# Altium PCB C2Sv0_PROCESSOR.PcbDoc (part 1 of 3)
Units mm, origin at the board's own origin, x right, y up, seen from the top; angles counter-clockwise.
Board outline 116 x 70 mm, 4 copper layers (Top Layer, Mid Layer 1, Mid Layer 2, Bottom Layer), stack 1.57 mm thick; 172 components, 108 nets, 793 pads, 402 vias.
Unrouted connection lines stored in the file: 3.
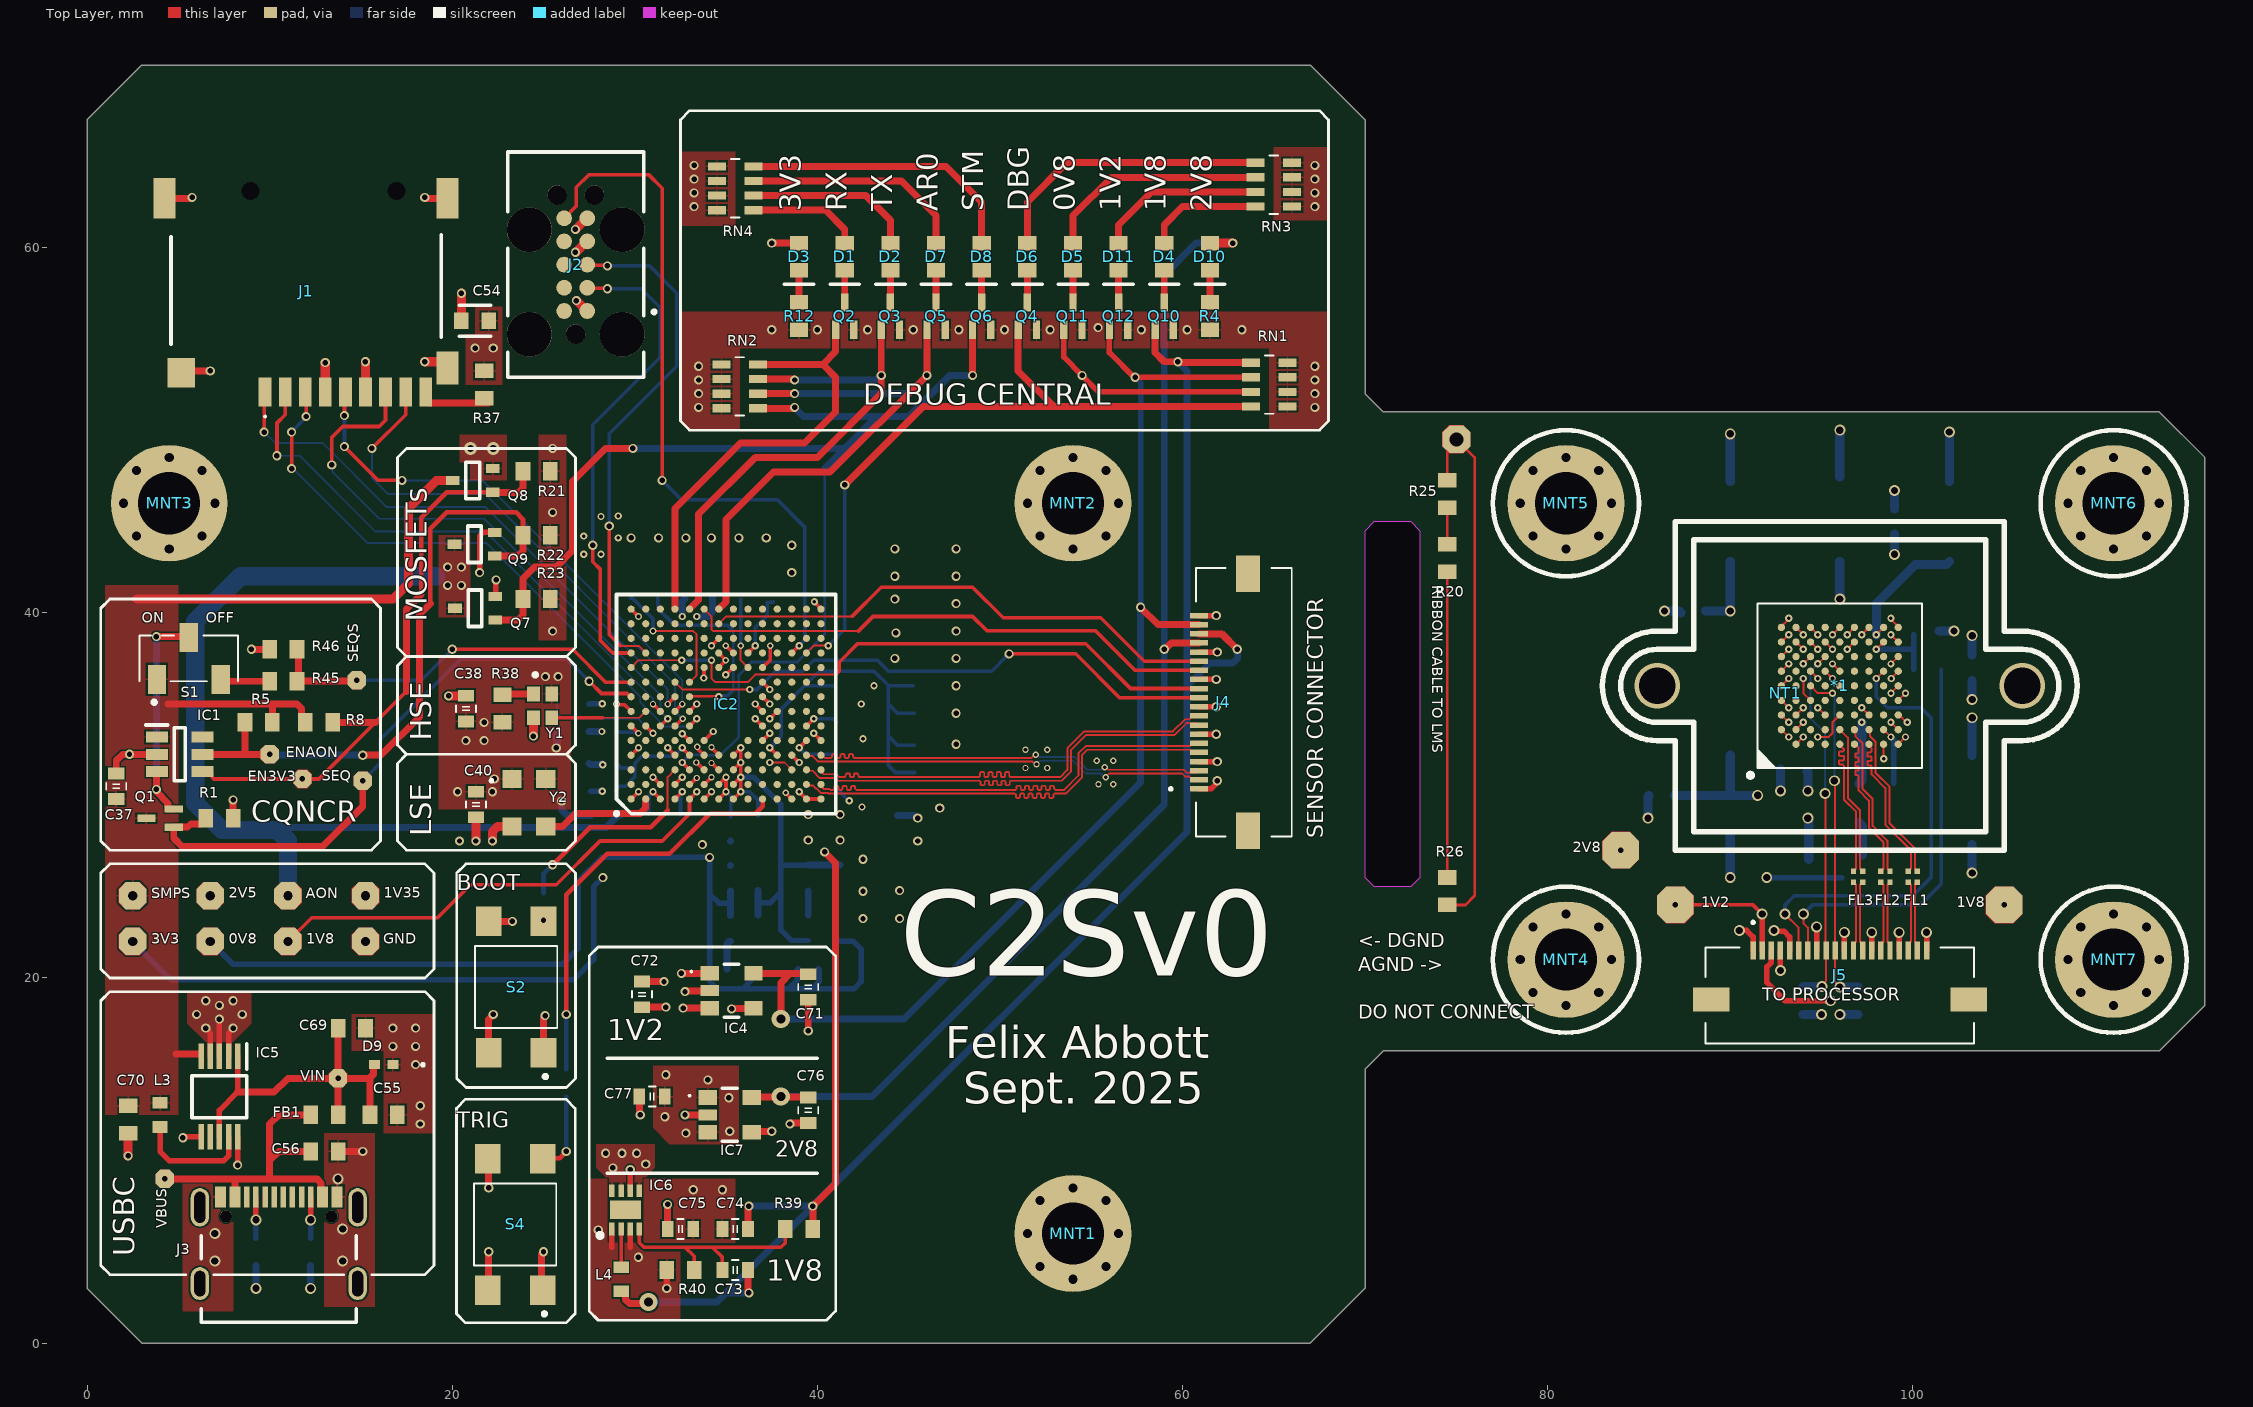
[diagram p0: Top Layer view]
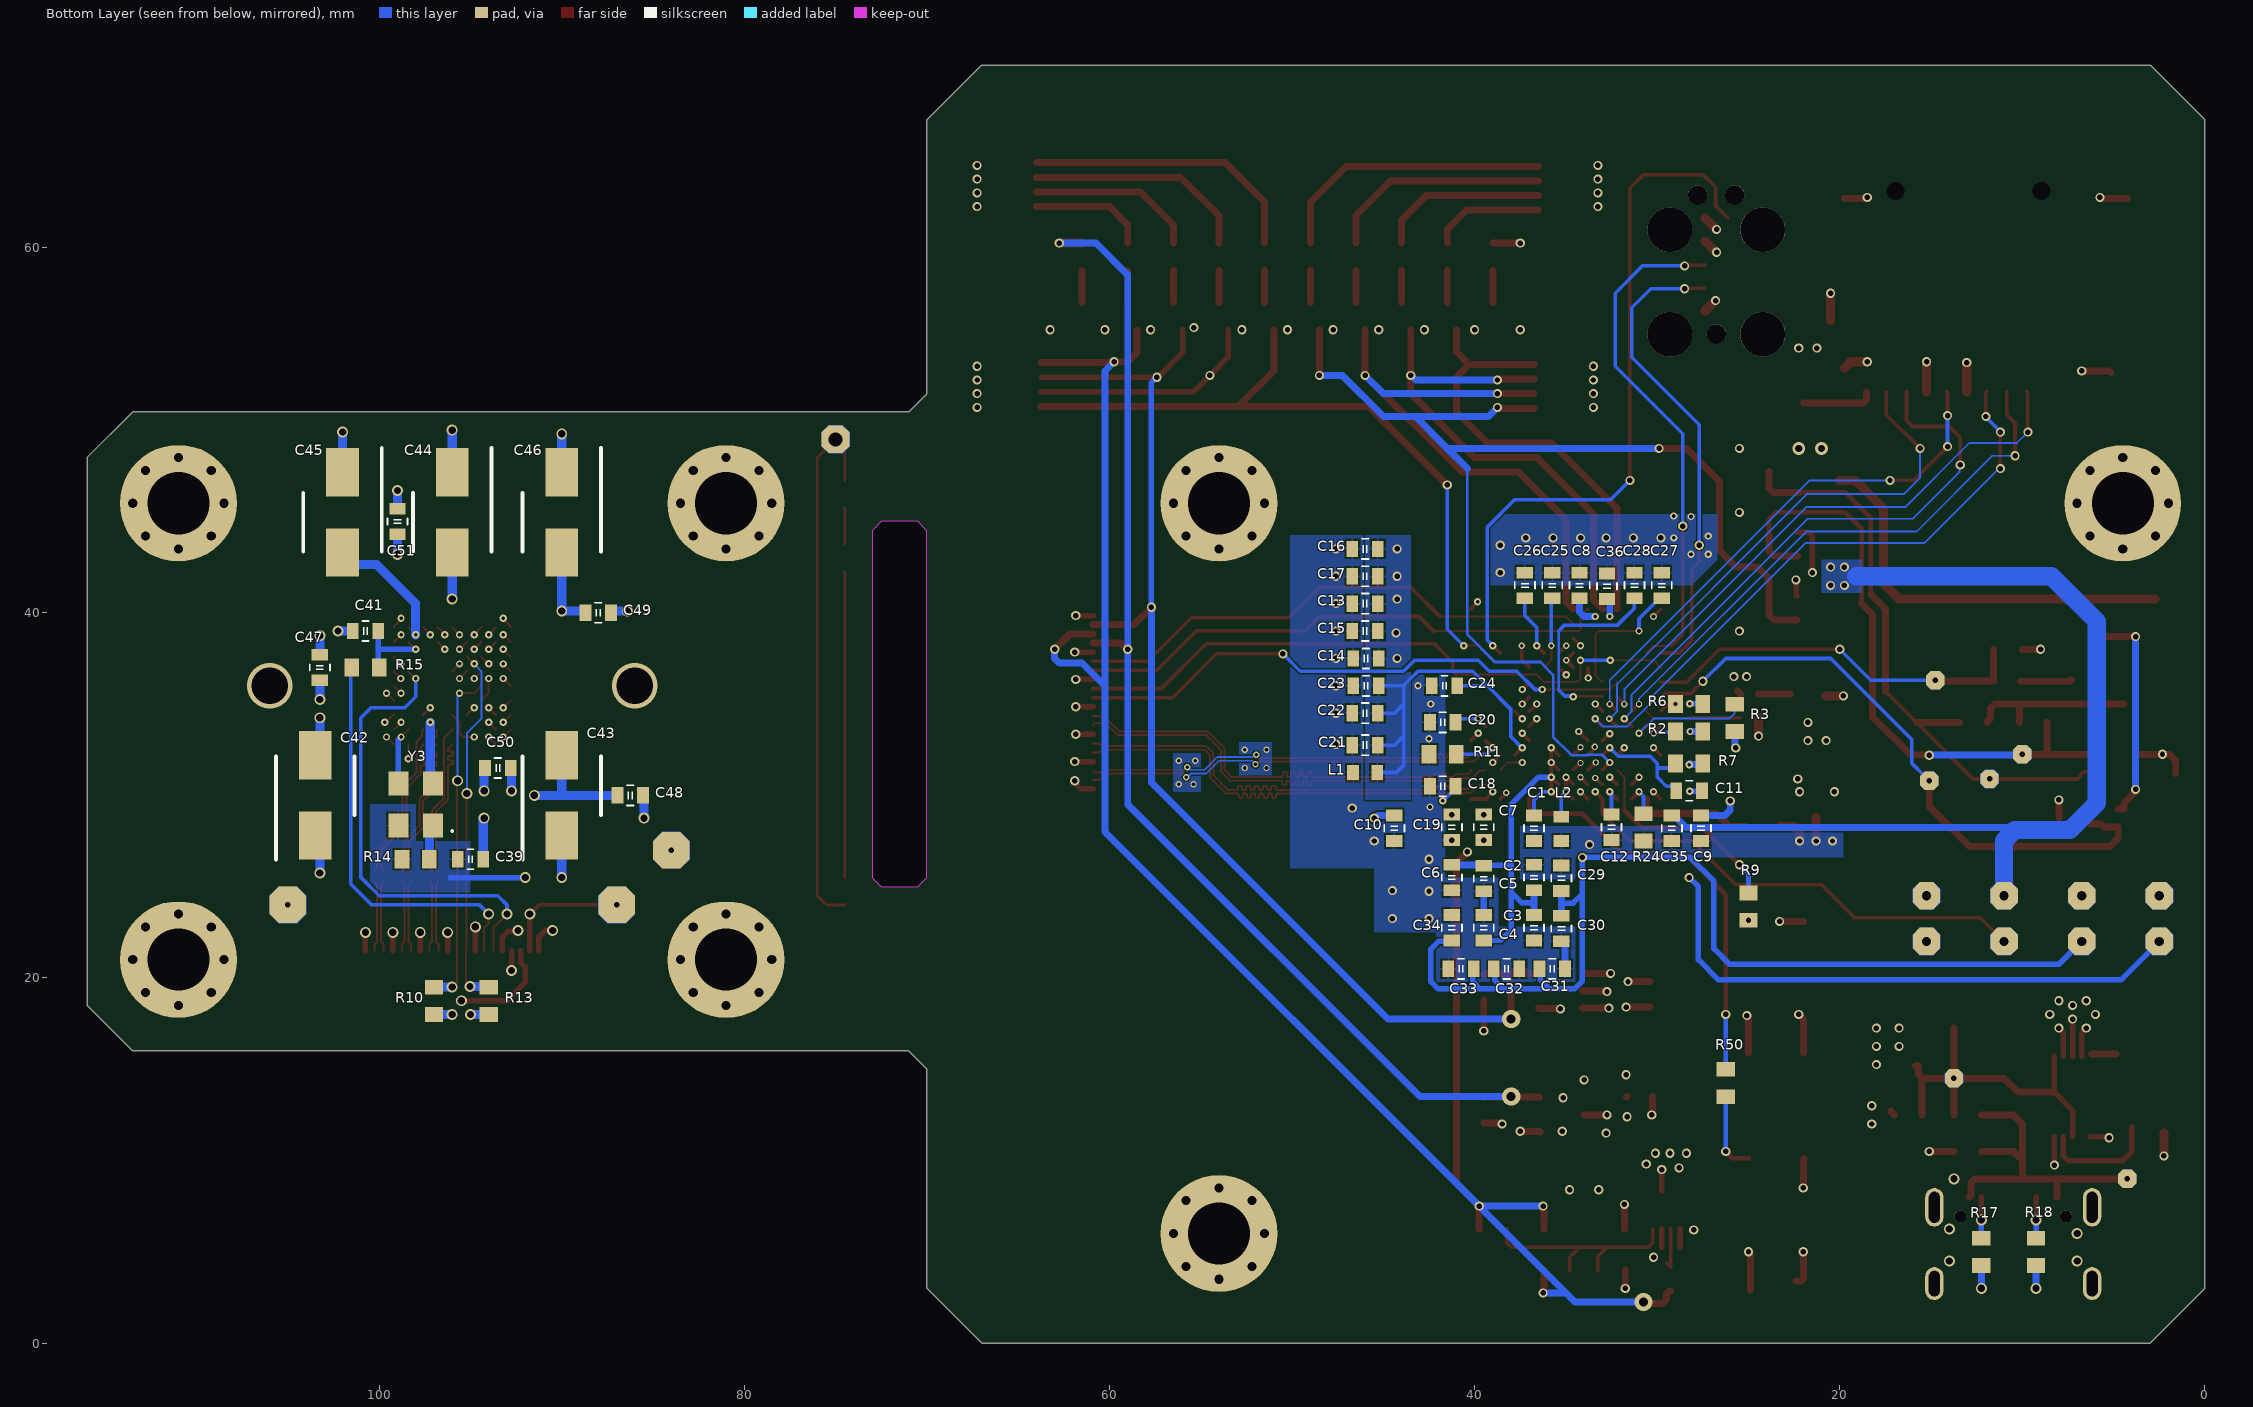
[diagram p1: Bottom Layer view, seen from below]
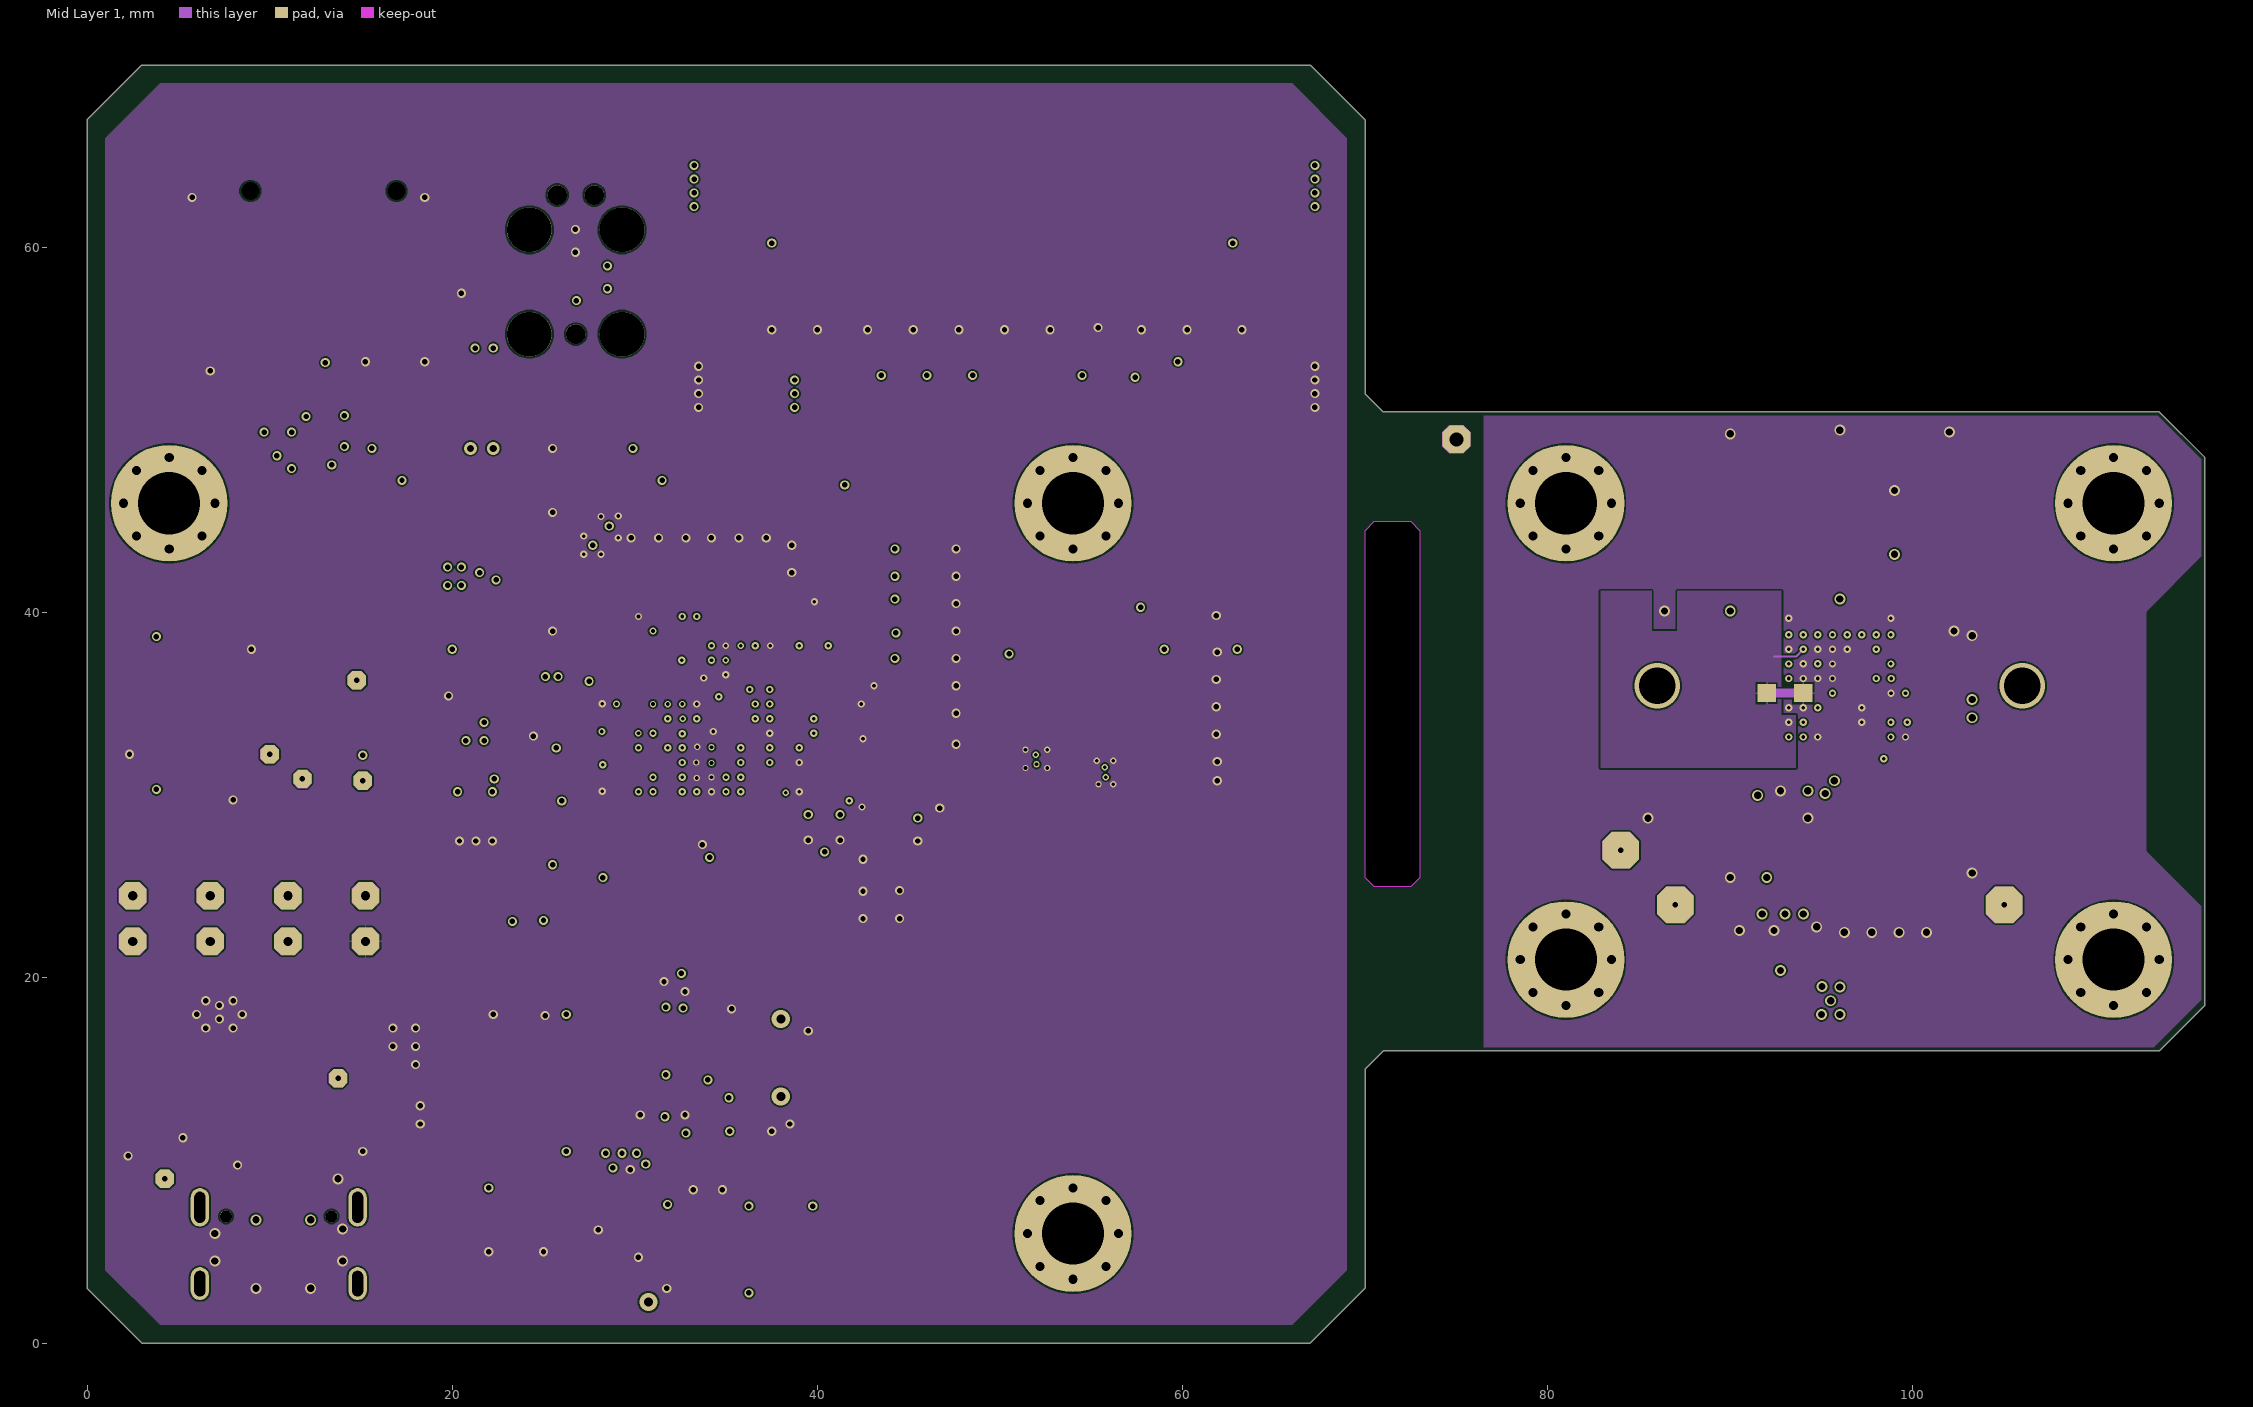
[diagram p2: Mid Layer 1]
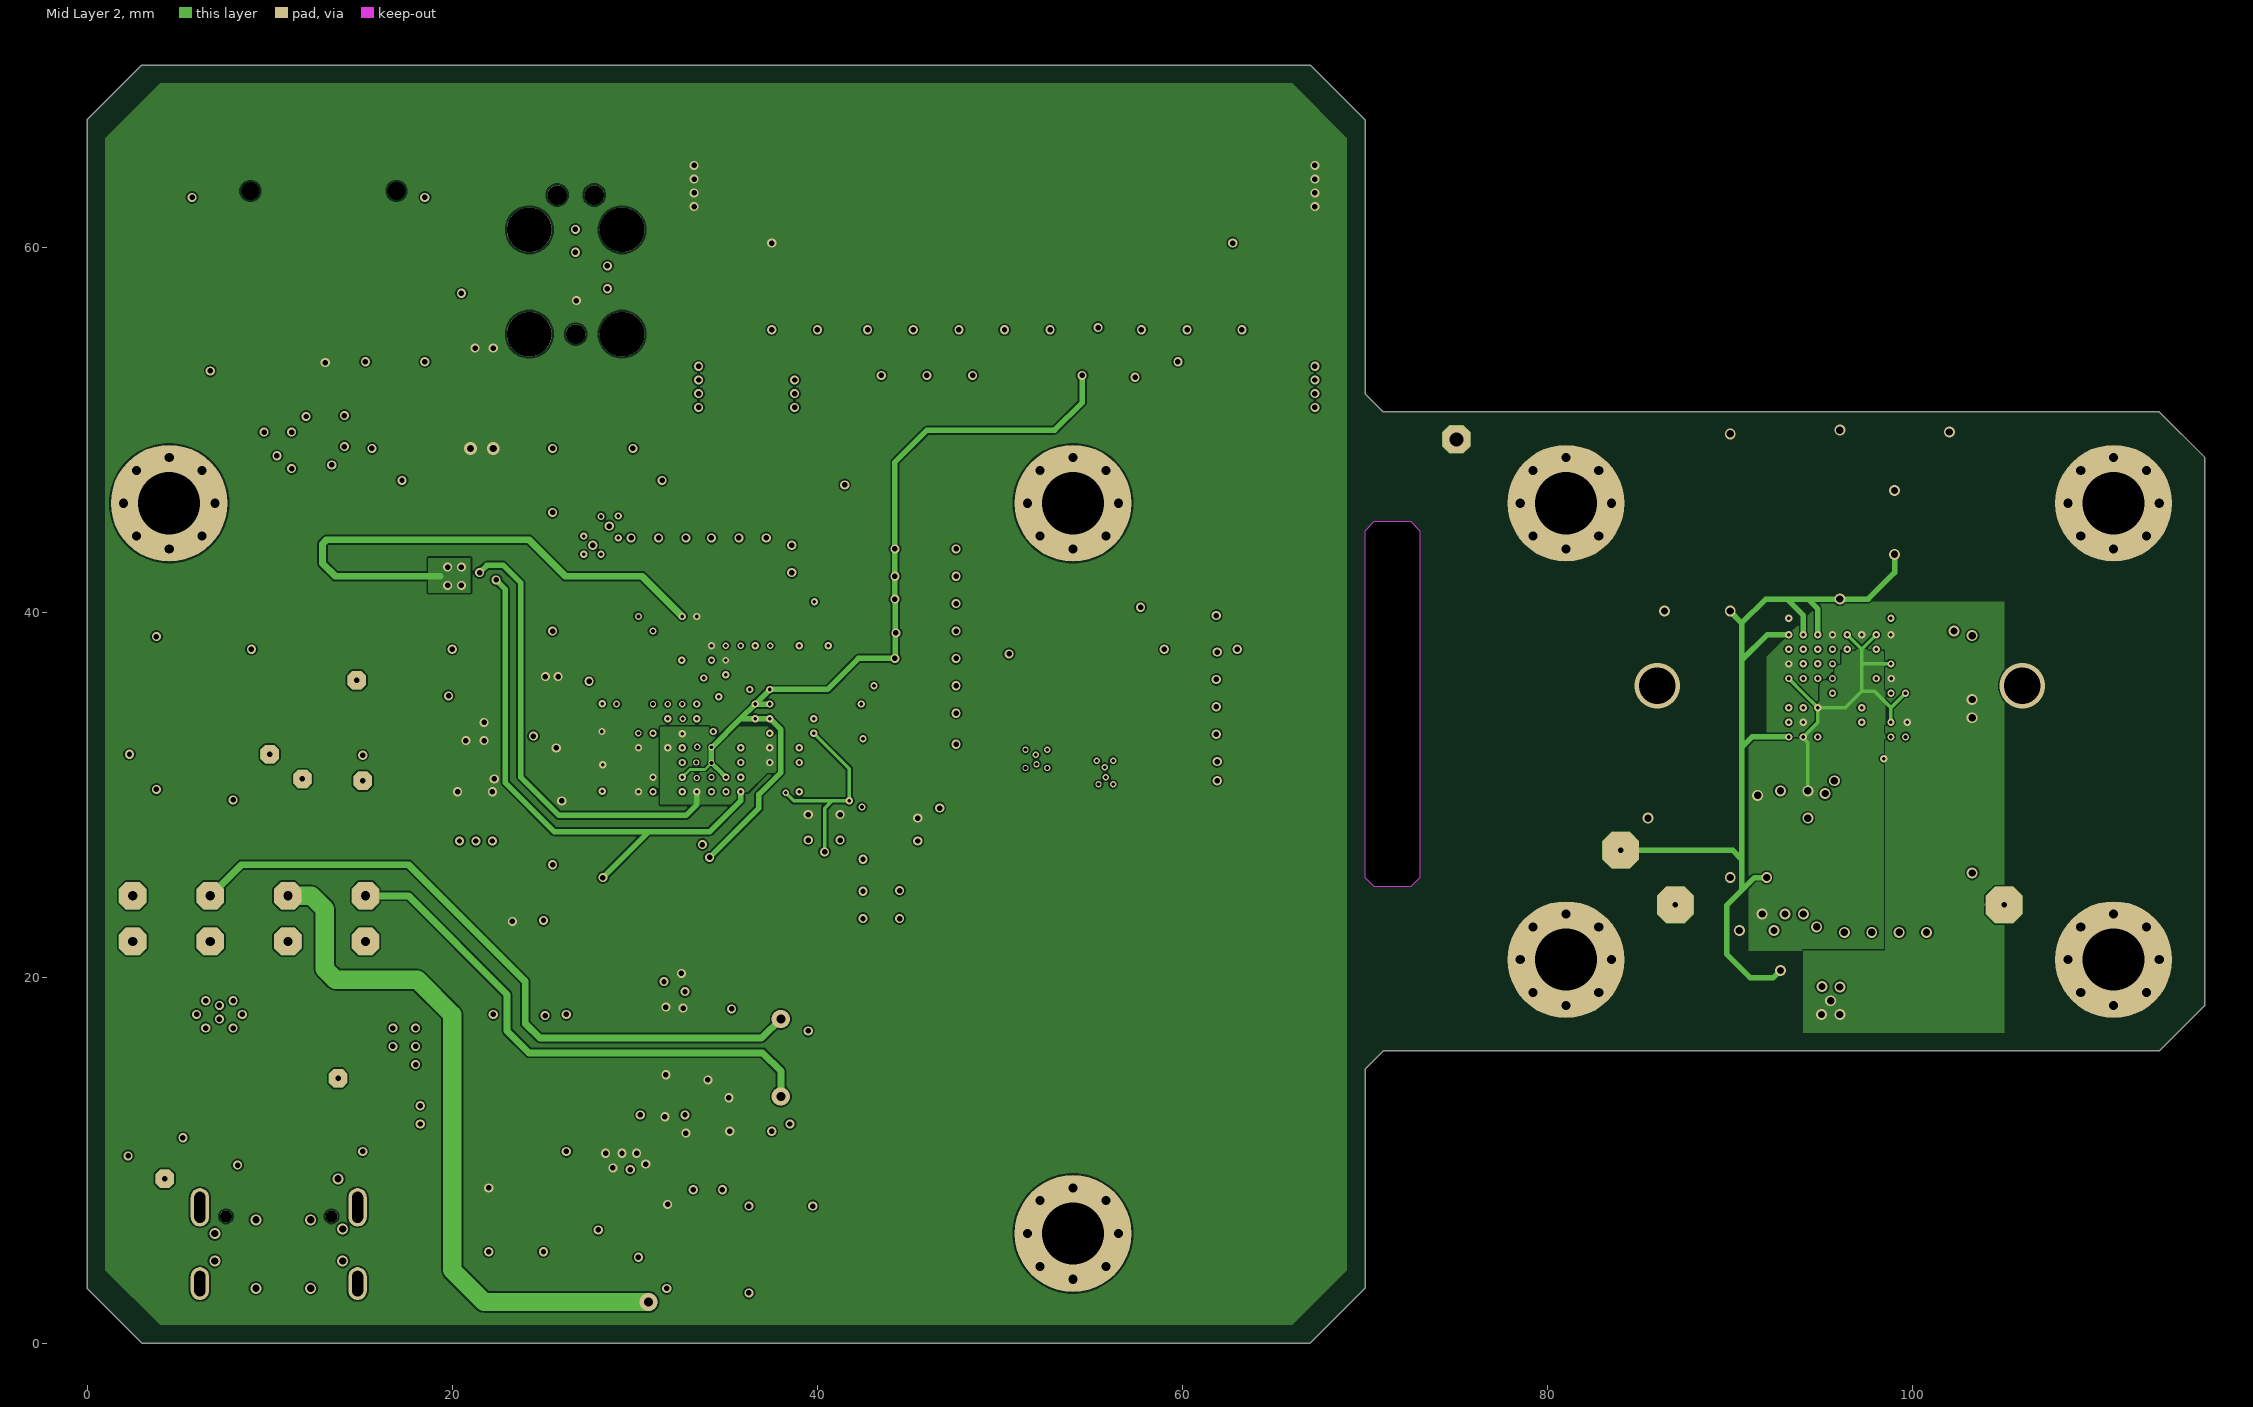
[diagram p3: Mid Layer 2]
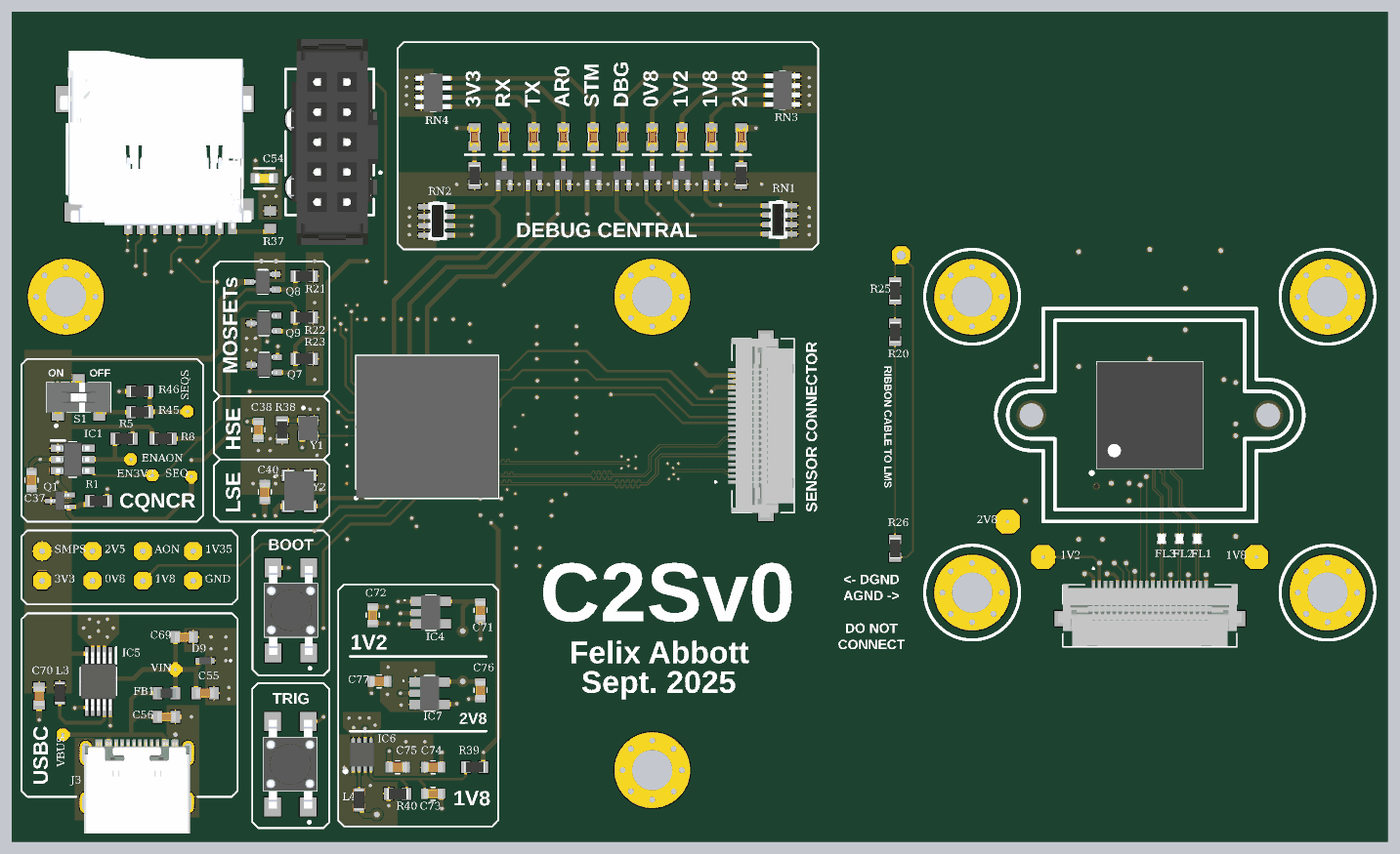
[diagram p5: 3D render of the assembled board from above, using the file's embedded part models]
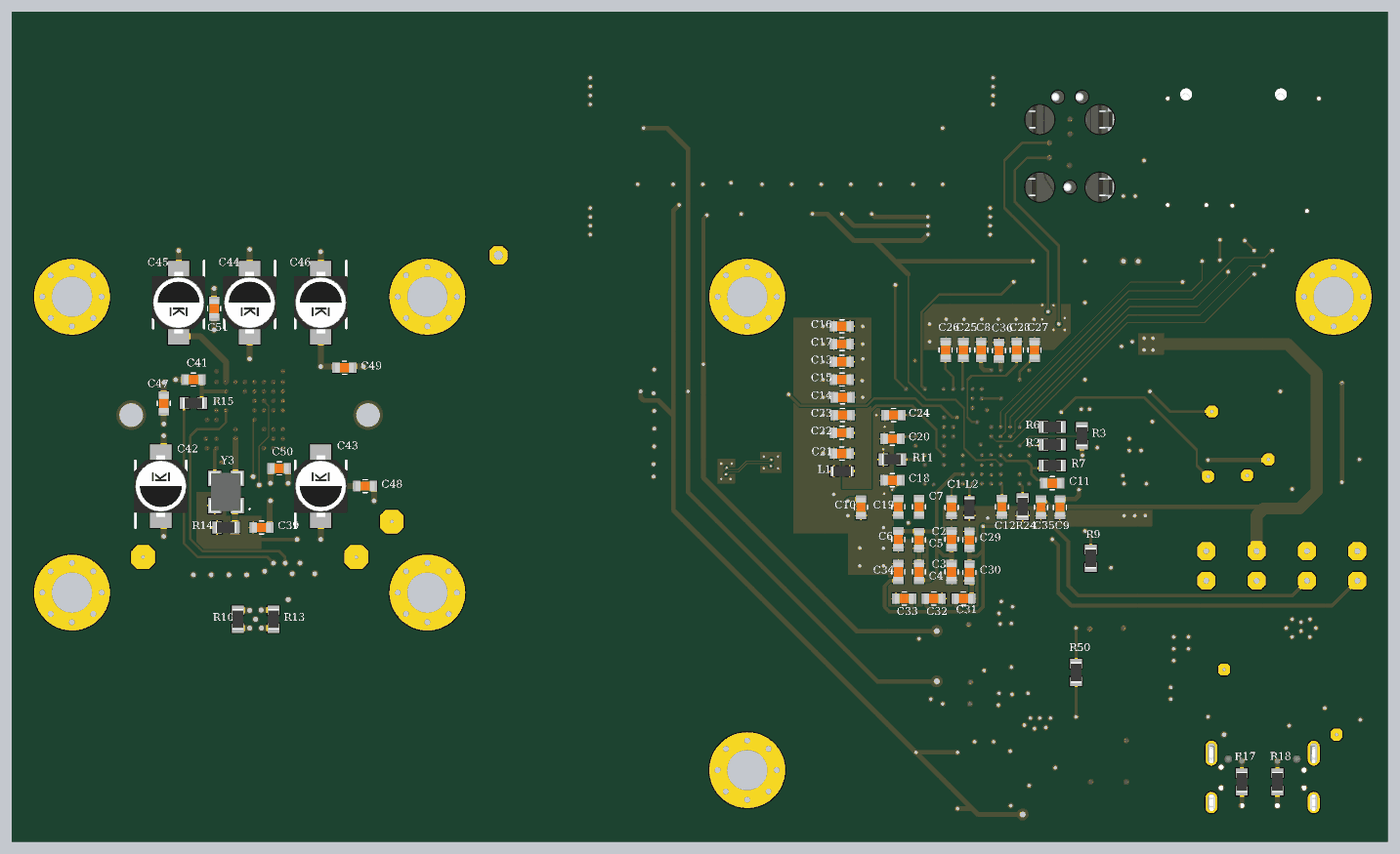
[diagram p6: 3D render of the assembled board from below, using the file's embedded part models]

## Layer stack, top to bottom
Top Solder: solder mask 0.0127, Solder Resist, Dk 3.8
Top Layer: signal copper 0.035
Dielectric 1: prepreg 0.1, 2313, Dk 4.05
Mid Layer 1: signal copper 0.0175
Core: core 1.265, FR-4, Dk 4.5
Mid Layer 2: signal copper 0.0175
Dielectric 2: prepreg 0.1, 2313, Dk 4.05
Bottom Layer: signal copper 0.035
Bottom Solder: solder mask 0.0127, Solder Resist, Dk 3.8

## Board outline
3,0 67,0 70,3 70,15 71,16 113.5,16 116,18.5 116,48.5 113.5,51 71,51 70,52 70,67 67,70 3,70 0,67 0,3
cut-out: 73,25.5 72.5,25 70.5,25 70,25.5 70,44.5 70.5,45 72.5,45 73,44.5

## Design rules (kind name [scope] priority, off if disabled: settings)
BoardOutlineClearance [All] p1: gap=0.2 ignorepadtopadclearanceinfootprint=FALSE
Clearance [All] p1: gap=0.089 ignorepadtopadclearanceinfootprint=TRUE except(0.1: Arc-Hole Track-Hole SMDPad-Hole THPad-Hole Via-Hole Fill-Hole Poly-Hole Region-Hole Text-Hole)
ComponentClearance [All] p1: gap=0.102 collisioncheckmode=3 verticalgap=0.102 showdistances=TRUE
DiffPairsRouting [All] p1: maxlimit=0.102 minlimit=0.102 mostfreqgap=0.102 toplayer_minwidth=0.102 toplayer_maxwidth=1816.048 toplayer_prefwidth=0.102 midlayer1_minwidth=0.102 midlayer1_maxwidth=1816.048 midlayer1_prefwidth=0.102 midlayer2_minwidth=0.102 midlayer2_maxwidth=1816.048 midlayer2_prefwidth=0.102 bottomlayer_minwidth=0.102 bottomlayer_maxwidth=1816.048 bottomlayer_prefwidth=0.102 maxuncoupledlength=12.7
Height [All] p1: minheight=0 maxheight=1816.048 prefheight=12.7
HoleSize [All] p1: absolutevalues=TRUE maxlimit=6.3 minlimit=0.2 maxpercent=80.000 minpercent=20.000
HoleToHoleClearance [All] p1: gap=0.25 allowstackedmicrovias=FALSE
MatchedLengths MatchedLengths_2 [InDifferentialPairClass('Post AR Diffs')] p1: tolerance=25.4 checknetsindiffpair=FALSE checkdiffpairvsdiffpair=TRUE checkxsignals=TRUE checkothers=TRUE usedelayunits=TRUE delaytolerance=20.000000
MatchedLengths MatchedLengths_1 [InDifferentialPairClass('STM Diffs')] p2: tolerance=25.4 checknetsindiffpair=FALSE checkdiffpairvsdiffpair=TRUE checkxsignals=TRUE checkothers=TRUE usedelayunits=TRUE delaytolerance=20.000000
MatchedLengths [InDifferentialPairClass('AR Diffs')] p3: tolerance=25.4 checknetsindiffpair=FALSE checkdiffpairvsdiffpair=TRUE checkxsignals=TRUE checkothers=TRUE usedelayunits=TRUE delaytolerance=20.000000
MinimumAnnularRing [All] p1: minimumring=0.05
MinimumSolderMaskSliver MinimumSolderMaskSliver_1 [All] p1: minsoldermaskwidth=0.102
MinimumSolderMaskSliver [All] p2: minsoldermaskwidth=0.102
PlaneClearance [All] p1: clearance=0.102
PlaneConnect PlaneConnectPowerPads [InPadClass('PowerPads')] p1: planeconnectstyle=Direct reliefexpansion=0.508 reliefentries=4 reliefconductorwidth=0.254 reliefairgap=0.254
PlaneConnect [All] p2: pad.planeconnectstyle=Relief pad.reliefexpansion=0.3 pad.reliefentries=4 pad.reliefconductorwidth=0.102 pad.reliefairgap=0.102 via.planeconnectstyle=Direct via.reliefexpansion=0.3 via.reliefentries=4 via.reliefconductorwidth=0.127 via.reliefairgap=0.127
PolygonConnect PolygonConnectPowerPads [All vs (InPadClass('PowerPads'))] p1: connectstyle=Direct reliefconductorwidth=0.254 reliefentries=4 polygonreliefangle="90 Angle" airgapwidth=0.254
PolygonConnect [All] p2: thpad.connectstyle=Relief thpad.reliefconductorwidth=0.102 thpad.reliefentries=4 thpad.polygonreliefangle="90 Angle" thpad.airgapwidth=0.102 smdpad.connectstyle=Relief smdpad.reliefconductorwidth=0.102 smdpad.reliefentries=4 smdpad.polygonreliefangle="90 Angle" smdpad.airgapwidth=0.102 via.connectstyle=Direct via.reliefconductorwidth=0.127 via.reliefentries=4 via.polygonreliefangle="90 Angle" via.airgapwidth=0.127
RoutingVias [All] p1: holewidth=0.2 width=0.45 viastyle="Through Hole" minholewidth=0.2 minwidth=0.3 maxholewidth=6.3 maxwidth=6.55
SilkToSilkClearance [All] p1: silktosilkclearance=0
SilkToSolderMaskClearance [IsPad] p1: minsilkscreentomaskgap=0.102 clearancetoexposedcopper=FALSE
SolderMaskExpansion SME_Via [IsVia] p1: expansion=0.102 istentingtop=TRUE
SolderMaskExpansion [All] p2: expansion=0.102 istentingtop=FALSE
SupplyNets "Schematic Supply Nets_9" [InNet('DGND')] p1: voltage=0.000
SupplyNets "Schematic Supply Nets_8" [InNet('AGND')] p2: voltage=0.000
SupplyNets "Schematic Supply Nets_7" [InNet('VDDCORE')] p3: voltage=0.000
SupplyNets "Schematic Supply Nets_6" [InNet('2V8')] p4: voltage=0.000
SupplyNets "Schematic Supply Nets_5" [InNet('GND')] p5: voltage=0.000
SupplyNets "Schematic Supply Nets_4" [InNet('VBUS')] p6: voltage=0.000
SupplyNets "Schematic Supply Nets_3" [InNet('3V3')] p7: voltage=0.000
SupplyNets "Schematic Supply Nets_2" [InNet('1V8')] p8: voltage=0.000
SupplyNets "Schematic Supply Nets_1" [InNet('1V2')] p9: voltage=0.000
SupplyNets "Schematic Supply Nets" [InNet('3V3+')] p10: voltage=0.000
Width [All] p1: maxlimit=1816.048 minlimit=0.076 preferedwidth=0.102
20 further rules are at their usual default settings.

## Classes and differential pairs
component class U_Sensor: 1V2 1V8 2V8 *1 C39 C41 C42 C43 C44 C45 C46 C47 C48 C49 C50 C51 FL1 FL2 FL3 J5 MNT4 MNT5 MNT6 MNT7 NT1 R10 R13 R14 R15 R20 R25 R26 Y3
component class "Top Level": J4 MNT1 MNT2 MNT3
component class U_USBC: 3V3 C55 C56 C69 C70 D9 FB1 GND IC5 J3 L3 R17 R18 VBUS VIN
component class U_SWD: J2
component class U_Sequencer: C37 EN3V3 ENAON IC1 Q1 R1 R5 R8 R45 R46 S1 SEQ SEQS
component class "U_SD Card": C54 J1 R37
component class U_MCU: 0V8 AON C1 C2 C3 C4 C5 C6 C7 C8 C9 C10 C11 C12 C13 C14 C15 C16 C17 C18 C19 C20 C21 C22 C23 C24 C25 C26 C27 C28 C29 C30 C31 C32 C33 C34 C35 C36 D1 D2 D3 D4 D5 D6 D7 D8 D10 D11 IC2 L1 L2 Q2 Q3 Q4 Q5 Q6 Q7 Q8 Q9 Q10 Q11 Q12 R2 R3 R4 R6 R7 R9 R11 R12 R21 R22 R23 R24 R50 RN1 RN2 RN3 RN4 S2 S4 SMPS
component class U_LPS: 1V8 1V35 2V5 C71 C72 C73 C74 C75 C76 C77 IC4 IC6 IC7 L4 R39 R40
component class U_Clocks: C38 C40 R38 Y1 Y2
differential pair MID_DATA1: +MID_DATA1_P -MID_DATA1_N
differential pair MID_DATA0: +MID_DATA0_P -MID_DATA0_N
differential pair MID_CLK: +MID_CLK_P -MID_CLK_N
differential pair AR_DATA1: +AR_DATA1_P -AR_DATA1_N
differential pair AR_DATA0: +AR_DATA0_P -AR_DATA0_N
differential pair AR_CLK: +AR_CLK_P -AR_CLK_N
differential pair STM_DATA1: +STM_DATA1_P -STM_DATA1_N
differential pair STM_DATA0: +STM_DATA0_P -STM_DATA0_N
differential pair STM_CLK: +STM_CLK_P -STM_CLK_N

## Components (designator, comment, footprint, x,y, rotation, side; value= is the part's Value field where it differs from the comment)
0V8 "TP_2MM" "TESTPOINT 2MM"#1 6.75,22 r270 top
1V2 "TP_2MM" "TESTPOINT 2MM"#2 87,24 r90 top
1V8 "TP_2MM" "TESTPOINT 2MM"#2 105,24 r90 top
1V8 "TP_2MM" "TESTPOINT 2MM"#3 11,22 r0 top
1V35 "TP_2MM" "TESTPOINT 2MM"#1 15.25,24.5 r0 top
2V5 "TP_2MM" "TESTPOINT 2MM"#1 6.75,24.5 r0 top
2V8 "TP_2MM" "TESTPOINT 2MM"#2 84,27 r90 top
3V3 "TP_2MM" "TESTPOINT 2MM"#4 2.5,22 r180 top
*1 "AR0147 - iBGA80" "AR0147 - IBGA80" 96,36 r0 top locked
AON "TP_2MM" "TESTPOINT 2MM"#5 11,24.5 r270 top
C1 "MCD-00237" C0603 36.75,28.2 r90 bottom value=10uF
C2 "MCD-00237" C0603 36.75,25.5 r270 bottom value=10uF
C3 "MCD-00237" C0603 36.75,22.75 r90 bottom value=1uF
C4 "MCD-00237" C0603 39.5,22.75 r270 bottom value=1uF
C5 "MCD-00237" C0603 39.5,25.45 r90 bottom value=100nF
C6 "MCD-00237" C0603 41.25,25.5 r90 bottom value=100nF
C7 "MCD-00237" C0603 39.5,28.25 r90 bottom value=100nF
C8 "MCD-00237" C0603 34.25,41.5 r270 bottom value=100nF
C9 "MCD-00237" C0603 27.6,28.2 r90 bottom value=100nF
C10 "MCD-00237" C0603 44.4,28.2 r90 bottom value=10uF
C11 "MCD-00237" C0603 28.25,30.25 r0 bottom value=100nF
C12 "MCD-00237" C0603 32.5,28.25 r90 bottom value=4.7uF
C13 "MCD-00237" C0603 46,40.5 r0 bottom value=1uF
C14 "MCD-00237" C0603 45.95,37.5 r0 bottom value=1uF
C15 "MCD-00237" C0603 46,39 r0 bottom value=1uF
C16 "MCD-00237" C0603 46,43.5 r0 bottom value=1uF
C17 "MCD-00237" C0603 46,42 r0 bottom value=1uF
C18 "MCD-00237" C0603 41.75,30.5 r180 bottom value=1uF
C19 "MCD-00237" C0603 41.25,28.25 r270 bottom value=1uF
C20 "MCD-00237" C0603 41.75,34 r180 bottom value=100nF
C21 "MCD-00237" C0603 46,32.75 r0 bottom value=100nF
C22 "MCD-00237" C0603 46,34.5 r0 bottom value=100nF
C23 "MCD-00237" C0603 45.95,36 r0 bottom value=100nF
C24 "MCD-00237" C0603 41.65,36 r0 bottom value=100nF
C25 "MCD-00237" C0603 35.75,41.5 r90 bottom value=100nF
C26 "MCD-00237" C0603 37.25,41.5 r90 bottom value=100nF
C27 "MCD-00237" C0603 29.75,41.5 r90 bottom value=100nF
C28 "MCD-00237" C0603 31.25,41.5 r90 bottom value=100nF
C29 "MCD-00237" C0603 35.25,25.46 r270 bottom value=1uF
C30 "MCD-00237" C0603 35.25,22.71 r270 bottom value=2.2uF
C31 "MCD-00237" C0603 35.75,20.5 r180 bottom value=15uF
C32 "MCD-00237" C0603 38.25,20.5 r0 bottom value=15uF
C33 "MCD-00237" C0603 40.75,20.5 r180 bottom value=15uF
C34 "MCD-00237" C0603 41.25,22.75 r90 bottom value=15uF
C35 "MCD-00237" C0603 29.2,28.2 r90 bottom value=100nF
C36 "MCD-00237" C0603 32.75,41.45 r270 bottom value=1uF
C37 "MCD-00237" C0603 1.6,30.5 r270 top value=1uF
C38 "MCD-00237" C0603 20.75,34.75 r270 top value=4.7uF
C39 "MCD-00237" C0603 95,26.5 r0 bottom value=4.7uF
C40 "MCD-00237" C0603 21.3,29.5 r270 top value=4.7uF
C41 "MCD-00237" C0603 100.75,39 r180 bottom value=100nF
C42 "EDH106M016A9BAA_1" EDH106M016A9BAA 103.5,30 r90 bottom
C43 "EDH106M016A9BAA_1" EDH106M016A9BAA 90,30 r90 bottom
C44 "EDH106M016A9BAA_1" EDH106M016A9BAA 96,45.5 r270 bottom
C45 "EDH106M016A9BAA_1" EDH106M016A9BAA 102,45.5 r270 bottom
C46 "EDH106M016A9BAA_1" EDH106M016A9BAA 90,45.5 r270 bottom
C47 "MCD-00237" C0603 103.25,37 r270 bottom value=0.1uF
C48 "MCD-00237" C0603 86.25,30 r0 bottom value=0.1uF
C49 "MCD-00237" C0603 88,40 r0 bottom value=0.1uF
C50 "MCD-00237" C0603 93.5,31.5 r0 bottom value=0.1uF
C51 "MCD-00237" C0603 99,45 r270 bottom value=0.1uF
C54 "CC0603KRX7R9BB103" FP-CC0603-DA-MFG 21.25,56 r180 top value="10 nF"
C55 "CAP_0603_16V" CAP_0603 16.25,12.5 r180 top
C56 "CAP_0603_16V" CAP_0603 13,10.5 r180 top
C69 "CAP_0603_16V" CAP_0603 14.5,17.25 r180 top
C70 "CAP_0603_16V" CAP_0603 2.25,12.25 r90 top
C71 "MCD-00237" C0603 39.5,19.5 r90 top value=1uF
C72 "MCD-00237" C0603 30.4,19.1 r270 top value=0.1uF
C73 "MCD-00237" C0603 35.5,4 r180 top value=22pF
C74 "MCD-00237" C0603 35.5,6.25 r180 top value=10uF
C75 "MCD-00237" C0603 32.5,6.25 r0 top value=10uF
C76 "MCD-00237" C0603 39.5,12.75 r90 top value=1uF
C77 "MCD-00237" C0603 30.95,13.5 r180 top value=0.1uF
D1 "LED_0603_RED" LED_0603_RED 41.5,59.5 r90 top
D2 "LED_0603_RED" LED_0603_RED 44,59.5 r90 top
D3 "LED_0603_RED" LED_0603_RED 39,59.5 r90 top
D4 "LED_0603_RED" LED_0603_RED 59,59.5 r90 top
D5 "LED_0603_RED" LED_0603_RED 54,59.5 r90 top
D6 "LED_0603_RED" LED_0603_RED 51.5,59.5 r90 top
D7 "LED_0603_RED" LED_0603_RED 46.5,59.5 r90 top
D8 "LED_0603_RED" LED_0603_RED 49,59.5 r90 top
D9 "TPD1E10B06DPYR" TPD1E10B06DPYR 16.25,15.25 r180 top
D10 "LED_0603_RED" LED_0603_RED 61.5,59.5 r90 top
D11 "LED_0603_RED" LED_0603_RED 56.5,59.5 r90 top
EN3V3 "TP_2MM" "TESTPOINT 2MM"#6 11.8,30.9 r0 top
ENAON "TP_2MM" "TESTPOINT 2MM"#6 10,32.25 r90 top
FB1 "120R" FB_0603 13,12.5 r180 top
FL1 "DLM0NSB120HY2D" DLM0NSB120HY2D 100,25.55 r270 top
FL2 "DLM0NSB120HY2D" DLM0NSB120HY2D 98.5,25.55 r270 top
FL3 "DLM0NSB120HY2D" DLM0NSB120HY2D 97,25.55 r270 top
GND "TP_2MM" "TESTPOINT 2MM"#1 15.25,22 r0 top
IC1 "LM3880MF-1AA_NOPB" LM3880MF-1AA_NOPB 5.075,32.25 r0 top
IC2 "STM32N657I0H3Q" BGA178C80P14X14_1200X1200X100 35,35 r90 top locked
IC4 "TCR2EF28,LM_CT" TCR2EF28,LM_CT 35.3,19.3 r270 top
IC5 "TPS62056DGS" TPS62056DGS 7.25,13.5 r270 top
IC6 "TPS62061DSGR" TPS62061DSGR 29.5,7.3 r90 top
IC7 "TCR2EF28,LM_CT" TCR2EF28,LM_CT 35.2,12.5 r270 top
J1 "MSD-4-A" MSD4A 12,59 r180 top locked
J2 "TC2050-IDC" TC2050-IDC 24.225,58.118 r90 top locked
J3 "USB4105-GF-A-060" USB4105-GF-A-060 10.5,5.636 r0 top locked
J4 "505110-2096" 5051102096 61.4,35.1 r90 top locked
J5 "505110-2096" 5051102096 96,21 r0 top locked
L1 "1uH" INDC1608X90X30LL10T20 46,31.25 r0 bottom
L2 "1uH" INDC1608X90X30LL10T20 35.25,28.16 r270 bottom
L3 "10uH" INDC1608X90X30LL10T20 4,12.5 r270 top
L4 "1uH" INDC1608X90X30LL10T20 29.25,3.5 r270 top
MNT1 "M3 Mount" M3_Mount-Footprint-1 54,6 r0 top
MNT2 "M3 Mount" M3_Mount-Footprint-1 54,46 r0 top locked
MNT3 "M3 Mount" M3_Mount-Footprint-1 4.5,46 r0 top
MNT4 "M3 Mount" M3_Mount-Footprint-1 81,21 r90 top
MNT5 "M3 Mount" M3_Mount-Footprint-1 81,46 r0 top
MNT6 "M3 Mount" M3_Mount-Footprint-1 111,46 r0 top
MNT7 "M3 Mount" M3_Mount-Footprint-1 111,21 r0 top
NT1 "NetTie_SMD" NETTIE_SMD 93,35.6 r0 top net-tie
Q1 "DMG1012T" SOT50P160X90-3N 4,28.75 r180 top
Q2 "DMG1012T" SOT50P160X90-3N 41.5,56.25 r90 top
Q3 "DMG1012T" SOT50P160X90-3N 44,56.25 r90 top
Q4 "DMG1012T" SOT50P160X90-3N 51.5,56.25 r90 top
Q5 "DMG1012T" SOT50P160X90-3N 46.5,56.25 r90 top
Q6 "DMG1012T" SOT50P160X90-3N 49,56.25 r90 top
Q7 "BSS214NWH6327XTSA1" BSS214NWH6327XTSA1 21.25,40.25 r180 top
Q8 "BSS214NWH6327XTSA1" BSS214NWH6327XTSA1 21.125,47.25 r180 top
Q9 "BSS214NWH6327XTSA1" BSS214NWH6327XTSA1 21.225,43.75 r180 top
Q10 "DMG1012T" SOT50P160X90-3N 59,56.25 r90 top
Q11 "DMG1012T" SOT50P160X90-3N 54,56.25 r90 top
Q12 "DMG1012T" SOT50P160X90-3N 56.5,56.25 r90 top
R1 "Resistor 10k +/-1% 0603 100mW" RESC1608X55X25ML10T15-1 7.25,28.75 r0 top value=10k
R2 "Resistor 10k +/-1% 0603 100mW" RESC1608X55X25ML10T15-1 28.25,33.5 r0 bottom value=10k
R3 "Resistor 10k +/-1% 0603 100mW" RESC1608X55X25ML10T15-1 25.75,34.25 r90 bottom value=10k
R4 "Resistor 10k +/-1% 0603 100mW" RESC1608X55X25ML10T15-1 61.5,56.25 r90 top value=470
R5 "Resistor 10k +/-1% 0603 100mW" RESC1608X55X25ML10T15-1 9.4,34 r180 top value=100k
R6 "Resistor 10k +/-1% 0603 100mW" RESC1608X55X25ML10T15-1 28.25,35 r0 bottom value=1k
R7 "Resistor 10k +/-1% 0603 100mW" RESC1608X55X25ML10T15-1 28.25,31.75 r0 bottom value=10k
R8 "Resistor 10k +/-1% 0603 100mW" RESC1608X55X25ML10T15-1 12.7,34 r0 top value=100k
R9 "Resistor 10k +/-1% 0603 100mW" RESC1608X55X25ML10T15-1 25,23.9 r90 bottom value=10k
R10 "Resistor 10k +/-1% 0603 100mW" RESC1608X55X25ML10T15-1 97,18.75 r90 bottom value=1.5k
R11 "Resistor 10k +/-1% 0603 100mW" RESC1608X55X25ML10T15-1 41.75,32.25 r180 bottom value=200
R12 "Resistor 10k +/-1% 0603 100mW" RESC1608X55X25ML10T15-1 39,56.25 r270 top value=470
R13 "Resistor 10k +/-1% 0603 100mW" RESC1608X55X25ML10T15-1 94,18.75 r90 bottom value=1.5k
R14 "Resistor 10k +/-1% 0603 100mW" RESC1608X55X25ML10T15-1 98,26.5 r180 bottom value=10k
R15 "Resistor 10k +/-1% 0603 100mW" RESC1608X55X25ML10T15-1 100.75,37 r180 bottom value=22k
R17 "Resistor 10k +/-1% 0603 100mW" RESC1608X55X25ML10T15-1 12.25,5 r270 bottom value=5.1k
R18 "Resistor 10k +/-1% 0603 100mW" RESC1608X55X25ML10T15-1 9.25,5 r270 bottom value=5.1k
R20 "Resistor 10k +/-1% 0603 100mW" RESC1608X55X25ML10T15-1 74.5,43 r270 top value=10k
R21 "Resistor 10k +/-1% 0603 100mW" RESC1608X55X25ML10T15-1 24.625,47.75 r0 top value=10k
R22 "Resistor 10k +/-1% 0603 100mW" RESC1608X55X25ML10T15-1 24.625,44.25 r0 top value=10k
R23 "Resistor 10k +/-1% 0603 100mW" RESC1608X55X25ML10T15-1 24.625,40.75 r0 top value=10k
R24 "Resistor 10k +/-1% 0603 100mW" RESC1608X55X25ML10T15-1 30.75,28.25 r270 bottom value=1k
R25 "Resistor 10k +/-1% 0603 100mW" RESC1608X55X25ML10T15-1 74.5,46.5 r90 top value=10k
R26 "Resistor 10k +/-1% 0603 100mW" RESC1608X55X25ML10T15-1 74.5,24.75 r90 top value=10k
R37 "RC0603JR-070RL" RESC1608X55X25ML10T15 21.75,52.5 r270 top
R38 "Resistor 10k +/-1% 0603 100mW" RESC1608X55X25ML10T15-1 22.75,34.75 r90 top value=10k
R39 "Resistor 10k +/-1% 0603 100mW" RESC1608X55X25ML10T15-1 39,6.25 r180 top value=1k
R40 "Resistor 10k +/-1% 0603 100mW" RESC1608X55X25ML10T15-1 32.5,4 r0 top value=1k
R45 "Resistor 10k +/-1% 0603 100mW" RESC1608X55X25ML10T15-1 10.75,36.25 r180 top value=10k
R46 "Resistor 10k +/-1% 0603 100mW" RESC1608X55X25ML10T15-1 10.75,38 r180 top value=100k
R50 "Resistor 10k +/-1% 0603 100mW" RESC1608X55X25ML10T15-1 26.25,14.25 r90 bottom value=10k
RN1 "BCN164AB103J7" BCN164AB103J7 64.75,52.5 r270 top
RN2 "BCN164AB103J7" BCN164AB103J7 35.75,52.4 r90 top
RN3 "BCN164AB471J7" BCN164AB471J7 65,63.45 r90 top
RN4 "BCN164AB471J7" BCN164AB471J7 35.5,63.25 r270 top
S1 "CJS-1200TA2" CJS1200TA2 5.575,37.5 r0 top
S2 "TL3305BF100QG" TL3305BF100QG 23.5,19.5 r90 top locked
S4 "TL3305BF100QG" TL3305BF100QG 23.45,6.5 r90 top locked
SEQ "TP_2MM" "TESTPOINT 2MM"#6 15.1,30.8 r0 top
SEQS "TP_2MM" "TESTPOINT 2MM"#6 14.775,36.3 r90 top
SMPS "TP_2MM" "TESTPOINT 2MM"#5 2.5,24.5 r270 top
VBUS "TP_2MM" "TESTPOINT 2MM"#6 4.25,9 r180 top
VIN "TP_2MM" "TESTPOINT 2MM"#6 13.75,14.5 r90 top locked
Y1 "ECS-TXO-2016-33-400-TR" ECS-TXO-2016-33-400-TR 24.95,34.9 r270 top locked
Y2 "ECS-TXO-20CSMV4-384-AY-TR" ECS-TXO-20CSMV4-384-AY-TR 24.2,29.6 r270 top
Y3 "ECS-TXO-3225MV-240-TR" ECSTXO3225MV240TR 98,29.5 r90 bottom

## Footprints (in the part's own frame and the unit in brackets; to place one, negate y for a bottom-side part, rotate by r counter-clockwise, add the part's x,y. Pads: shape width x height; smd on the part's side, far side on the other; paste and mask are expansions set on the pad)
5051102096 [mm]
  rect 0.3x1 smd mask+0.038: 1(-4.75,0.5) 2(-4.25,0.5) 3(-3.75,0.5) 4(-3.25,0.5) 5(-2.75,0.5) 6(-2.25,0.5) 7(-1.75,0.5) 8(-1.25,0.5) 9(-0.75,0.5) 10(-0.25,0.5) 11(0.25,0.5) 12(0.75,0.5) 13(1.25,0.5) 14(1.75,0.5) 15(2.25,0.5) 16(2.75,0.5) 17(3.25,0.5) 18(3.75,0.5) 19(4.25,0.5) 20(4.75,0.5)
  rect 2x1.3 smd: MP1(-7.05,-2.185) MP2(7.05,-2.185)
  silkscreen extent -7.35,-4.58 7.35,2.09, body extent -7.75,-4.53 7.75,0.77, height 1.9
"AR0147 - IBGA80" [mm]
  round 0.4 smd: A2(-3.2,-2.4) A3(-3.2,-1.6) A4(-3.2,-0.8) A5(-3.2,0) A6(-3.2,0.8) A7(-3.2,1.6) A8(-3.2,2.4) A9(-3.2,3.2) B1(-2.4,-3.2) B2(-2.4,-2.4) B3(-2.4,-1.6) B4(-2.4,-0.8) B5(-2.4,0) B6(-2.4,0.8) B7(-2.4,1.6) B8(-2.4,2.4) B9(-2.4,3.2) C1(-1.6,-3.2) C2(-1.6,-2.4) C3(-1.6,-1.6) C4(-1.6,-0.8) C5(-1.6,0) C6(-1.6,0.8) C7(-1.6,1.6) C8(-1.6,2.4) C9(-1.6,3.2) D1(-0.8,-3.2) D2(-0.8,-2.4) D3(-0.8,-1.6) D4(-0.8,-0.8) D5(-0.8,0) D6(-0.8,0.8) D7(-0.8,1.6) D8(-0.8,2.4) D9(-0.8,3.2) E1(0,-3.2) E2(0,-2.4) E3(0,-1.6) E4(0,-0.8) E5(0,0) E6(0,0.8) E7(0,1.6) E8(0,2.4) E9(0,3.2) F1(0.8,-3.2) F2(0.8,-2.4) F3(0.8,-1.6) F4(0.8,-0.8) F5(0.8,0) F6(0.8,0.8) F7(0.8,1.6) F8(0.8,2.4) F9(0.8,3.2) G1(1.6,-3.2) G2(1.6,-2.4) G3(1.6,-1.6) G4(1.6,-0.8) G5(1.6,0) G6(1.6,0.8) G7(1.6,1.6) G8(1.6,2.4) G9(1.6,3.2) H1(2.4,-3.2) H2(2.4,-2.4) H3(2.4,-1.6) H4(2.4,-0.8) H5(2.4,0) H6(2.4,0.8) H7(2.4,1.6) H8(2.4,2.4) H9(2.4,3.2) J1(3.2,-3.2) J2(3.2,-2.4) J3(3.2,-1.6) J4(3.2,-0.8) J5(3.2,0) J6(3.2,0.8) J7(3.2,1.6) J8(3.2,2.4) J9(3.2,3.2)
  silkscreen extent -13,-9 13,9, body extent -4.5,-4.5 4.5,4.5, height 1.5
BCN164AB103J7 [mm]
  rect 0.45x1 smd: 1(-1.2,-1) 2(-1.2,1) 3(-0.4,-1) 4(-0.4,1) 5(0.4,-1) 6(0.4,1) 7(1.2,-1) 8(1.2,1)
  silkscreen extent -1.6,-0.25 1.6,0.25, body extent -1.6,-0.93 1.6,0.67, height 0.51
BCN164AB471J7 [mm]
  rect 0.45x1 smd: 1(-1.2,-1) 2(-0.4,-1) 3(0.4,-1) 4(1.2,-1) 5(1.2,1) 6(0.4,1) 7(-0.4,1) 8(-1.2,1)
  silkscreen extent -1.6,-0.25 1.6,0.25, body extent -1.6,-1.46 1.6,1.46, height 0.7
BGA178C80P14X14_1200X1200X100 [mm]
  round 0.394 smd: A1(-5.2,5.2) A2(-4.4,5.2) A3(-3.6,5.2) A4(-2.8,5.2) A5(-2,5.2) A6(-1.2,5.2) A7(-0.4,5.2) A8(0.4,5.2) A9(1.2,5.2) A10(2,5.2) A11(2.8,5.2) A12(3.6,5.2) A13(4.4,5.2) A14(5.2,5.2) B1(-5.2,4.4) B2(-4.4,4.4) B3(-3.6,4.4) B4(-2.8,4.4) B5(-2,4.4) B6(-1.2,4.4) B7(-0.4,4.4) B8(0.4,4.4) B9(1.2,4.4) B10(2,4.4) B11(2.8,4.4) B12(3.6,4.4) B13(4.4,4.4) B14(5.2,4.4) C1(-5.2,3.6) C2(-4.4,3.6) C3(-3.6,3.6) C4(-2.8,3.6) C5(-2,3.6) C6(-1.2,3.6) C7(-0.4,3.6) C8(0.4,3.6) C9(1.2,3.6) C10(2,3.6) C11(2.8,3.6) C12(3.6,3.6) C13(4.4,3.6) C14(5.2,3.6) D1(-5.2,2.8) D2(-4.4,2.8) D3(-3.6,2.8) D4(-2.8,2.8) D5(-2,2.8) D6(-1.2,2.8) D7(-0.4,2.8) D8(0.4,2.8) D9(1.2,2.8) D10(2,2.8) D11(2.8,2.8) D12(3.6,2.8) D13(4.4,2.8) D14(5.2,2.8) E1(-5.2,2) E2(-4.4,2) E3(-3.6,2) E4(-2.8,2) E5(-2,2) E6(-1.2,2) E7(-0.4,2) E8(0.4,2) E9(1.2,2) E10(2,2) E11(2.8,2) E12(3.6,2) E13(4.4,2) E14(5.2,2) F1(-5.2,1.2) F2(-4.4,1.2) F3(-3.6,1.2) F4(-2.8,1.2) F5(-2,1.2) F10(2,1.2) F11(2.8,1.2) F12(3.6,1.2) F13(4.4,1.2) F14(5.2,1.2) G1(-5.2,0.4) G2(-4.4,0.4) G3(-3.6,0.4) G4(-2.8,0.4) G10(2,0.4) G11(2.8,0.4) G12(3.6,0.4) G13(4.4,0.4) G14(5.2,0.4) H1(-5.2,-0.4) H2(-4.4,-0.4) H3(-3.6,-0.4) H4(-2.8,-0.4) H10(2,-0.4) H11(2.8,-0.4) H12(3.6,-0.4) H13(4.4,-0.4) H14(5.2,-0.4) J1(-5.2,-1.2) J2(-4.4,-1.2) J3(-3.6,-1.2) J4(-2.8,-1.2) J5(-2,-1.2) J10(2,-1.2) J11(2.8,-1.2) J12(3.6,-1.2) J13(4.4,-1.2) J14(5.2,-1.2) K1(-5.2,-2) K2(-4.4,-2) K3(-3.6,-2) K4(-2.8,-2) K5(-2,-2) K6(-1.2,-2) K7(-0.4,-2) K8(0.4,-2) K9(1.2,-2) K10(2,-2) K11(2.8,-2) K12(3.6,-2) K13(4.4,-2) K14(5.2,-2) L1(-5.2,-2.8) L2(-4.4,-2.8) L3(-3.6,-2.8) L4(-2.8,-2.8) L5(-2,-2.8) L6(-1.2,-2.8) L7(-0.4,-2.8) L8(0.4,-2.8) L9(1.2,-2.8) L10(2,-2.8) L11(2.8,-2.8) L12(3.6,-2.8) L13(4.4,-2.8) L14(5.2,-2.8) M1(-5.2,-3.6) M2(-4.4,-3.6) M3(-3.6,-3.6) M4(-2.8,-3.6) M5(-2,-3.6) M6(-1.2,-3.6) M7(-0.4,-3.6) M8(0.4,-3.6) M9(1.2,-3.6) M10(2,-3.6) M11(2.8,-3.6) M12(3.6,-3.6) M13(4.4,-3.6) M14(5.2,-3.6) N1(-5.2,-4.4) N2(-4.4,-4.4) N3(-3.6,-4.4) N4(-2.8,-4.4) N5(-2,-4.4) N6(-1.2,-4.4) N7(-0.4,-4.4) N8(0.4,-4.4) N9(1.2,-4.4) N10(2,-4.4) N11(2.8,-4.4) N12(3.6,-4.4) N13(4.4,-4.4) N14(5.2,-4.4) P1(-5.2,-5.2) P2(-4.4,-5.2) P3(-3.6,-5.2) P4(-2.8,-5.2) P5(-2,-5.2) P6(-1.2,-5.2) P7(-0.4,-5.2) P8(0.4,-5.2) P9(1.2,-5.2) P10(2,-5.2) P11(2.8,-5.2) P12(3.6,-5.2) P13(4.4,-5.2) P14(5.2,-5.2)
  silkscreen extent -6.1,-6 6,6.1, body extent -6,-6 6,6, height 1
BSS214NWH6327XTSA1 [mm]
  rect 0.75x0.5 smd: 1(-1.1,0.65) 2(-1.1,-0.65) 3(1.1,0)
  silkscreen extent -0.38,-1 0.38,1, body extent -1.05,-1 1.05,1, height 1
C0603 [mm]
  rect 0.64x0.89 smd mask+0.05: 1(-0.7,0) 2(0.7,0)
  silkscreen extent -0.18,-0.55 0.18,0.55, body extent -0.9,-0.5 0.9,0.5, height 1.4
CAP_0603 [mm]
  rect 0.8x1 smd: 1(-0.75,0) 2(0.75,0)
  body extent -0.8,-0.4 0.8,0.4, height 0.51
CJS1200TA2 [mm]
  rect 1x1.6 smd: 1(-1.75,-1.15) 2(0,1.15) 3(1.75,-1.15)
  silkscreen extent -2.7,-2.5 2.7,1.25, body extent -2.7,-1.4 2.7,1.4, height 2.52
DLM0NSB120HY2D [mm]
  rect 0.3x0.3 smd mask+0.038: 1(-0.3,0.25) 2(0.3,0.25) 3(0.3,-0.25) 4(-0.3,-0.25)
  body extent -0.43,-0.33 0.43,0.33, height 0.45
ECS-TXO-20CSMV4-384-AY-TR [mm]
  rect 1x1.05 smd: 1(-1.3,-0.925) 2(1.3,-0.925) 3(1.3,0.925) 4(-1.3,0.925)
  silkscreen extent -1.25,-2.1 -1.15,-2, body extent -1.7,-1.35 1.7,1.35, height 1.5
ECS-TXO-2016-33-400-TR [mm]
  rect 0.8x0.7 smd mask+0.076: 1(-0.65,-0.5) 2(0.65,-0.5) 3(0.65,0.5) 4(-0.65,0.5)
  silkscreen extent -1.8,-0.5 -1.6,-0.3, body extent -1,-0.8 1,0.8, height 0.9
ECSTXO3225MV240TR [mm]
  rect 1.3x1.1 smd: 1(-1.15,-0.95) 2(1.15,-0.95) 3(1.15,0.95) 4(-1.15,0.95)
  silkscreen extent -1.5,-2.05 -1.4,-1.95, body extent -1.69,-1.39 1.69,1.39, height 1.3
EDH106M016A9BAA [mm]
  rect 2.65x1.8 smd: 1(-2.2,0) 2(2.2,0)
  silkscreen extent -3.52,-2.15 2.15,2.15, body extent -2.6,-2.25 2.6,2.25, height 5.66
FB_0603 [mm]
  rect 0.8x1 smd: 1(-0.75,0) 2(0.75,0)
  body extent -0.8,-0.4 0.8,0.4, height 0.81
FP-CC0603-DA-MFG [mm]
  rect 0.8x0.9 smd paste+0 mask+0: 1(-0.75,0) 2(0.75,0)
  silkscreen extent -0.85,-0.85 0.85,0.85, body extent -1.35,-0.75 1.35,0.75, height 0.25
INDC1608X90X30LL10T20 [mm] "Chip Inductor, 2-Leads, Body 1.7x0.9mm, IPC High Density"
  rect 0.64x0.84 smd: 1(-0.66,0) 2(0.66,0)
  body extent -0.85,-0.45 0.85,0.45, height 0.9
LED_0603_RED [mm]
  rect 0.8x1 smd: A(0.75,0) K(-0.75,0)
  silkscreen extent -1.5,-0.8 -1.5,0.8, body extent -0.8,-0.4 0.8,0.4, height 0.6
LM3880MF-1AA_NOPB [mm]
  rect 1.2x0.6 smd: 1(-1.25,0.95) 2(-1.25,0) 3(-1.25,-0.95) 4(1.25,-0.95) 5(1.25,0) 6(1.25,0.95)
  silkscreen extent -1.85,-1.45 0.3,1.6, body extent -1.4,-1.45 1.4,1.45, height 1.45
M3_Mount-Footprint-1 [mm]
  round 0.8 hole 0.5: 1(-2.5,0) 1(-1.8,-1.8) 1(-1.8,1.8) 1(0,-2.5) 1(0,2.5) 1(1.8,-1.8) 1(1.8,1.8) 1(2.5,0)
  round 6.4 hole 3.4: 1(0,0)
MSD4A [mm]
  rect 0.7x1.6 smd: 1(2.25,6.9) 2(1.15,6.9) 3(0.05,6.9) 4(-1.05,6.9) 5(-2.15,6.9) 6(-3.25,6.9) 7(-4.35,6.9) 8(-5.45,6.9)
  rect 0.7x1.6 smd mask+0.051: CD1(-6.55,6.9)
  rect 1.5x1.6 smd: G1(6.85,5.85)
  rect 1.2x2.2 smd: G2(7.75,-3.7) G3(-7.75,-3.7)
  rect 1.2x1.8 smd mask+0.051: G4(-7.75,5.6)
  round 0.5 hole 1 unplated: MH1(3.05,-4.1) MH2(-4.95,-4.1)
  silkscreen extent -7.4,-1.7 7.4,8.3, body extent -8.16,-7.79 7.99,7.26, height 1.9
NETTIE_SMD [mm]
  rect 1x1 on Mid1 mask-10: 1(-1,0) 2(1,0)
  Mid Layer 1 region: -0.75,-0.251 0.75,-0.251 0.75,0.249 -0.75,0.249
RESC1608X55X25ML10T15 [mm] "Chip Resistor, 2-Leads, Body 1.60x0.80mm, IPC Low Density"
  rect 0.8x1 smd: 1(-0.75,0) 2(0.75,0)
  body extent -0.85,-0.45 0.85,0.45, height 0.55
RESC1608X55X25ML10T15-1 [mm] "Chip Resistor, 2-Leads, Body 1.70x0.90mm, IPC Low Density"
  rect 0.8x1 smd: 1(-0.75,0) 2(0.75,0)
  body extent -0.85,-0.45 0.85,0.45, height 0.55
SOT50P160X90-3N [mm]
  rect 1x0.4 smd: 1(-0.75,0.5) 2(-0.75,-0.5) 3(0.75,0)
  body extent -0.8,-0.8 0.8,0.8, height 0.9
TC2050-IDC [mil]
  round 34 smd: 1(-62.5,-125) 2(-12.5,-125) 3(37.5,-125) 4(87.5,-125) 5(137.5,-125) 6(137.5,-75) 7(87.5,-75) 8(37.5,-75) 9(-12.5,-75) 10(-62.5,-75)
  round 42 hole 42 unplated: 11(-112.5,-100) 12(187.5,-60.04) 13(187.5,-139.96)
  round 96.5 hole 96.5 unplated: 14(112.5,-200) 15(-112.5,-200) 16(-112.5,0) 17(112.5,0)
  silkscreen extent -205,-273 280,47, body extent -305,-260 380,42, height 8191
TCR2EF28,LM_CT [mm]
  rect 0.8x1 smd mask+0.051: 1(-0.95,-1.2) 3(0.95,-1.2)
  rect 0.6x1 smd mask+0.051: 2(0,-1.2)
  rect 0.8x1 smd: 4(0.95,1.2) 5(-0.95,1.2)
  silkscreen extent -1.45,-2.25 1.45,0.4, body extent -1.45,-0.8 1.45,0.8, height 1.5
"TESTPOINT 2MM"#1 [mm]
  oct 1.5x1.5 hole 0.5: TP(0,0)
  Top Layer region: -0.375,-0.75 -0.75,-0.375 -0.75,0.375 -0.375,0.75 0.375,0.75 0.75,0.375 0.75,-0.375 0.375,-0.75
  Mid Layer 1 region: -0.375,-0.75 -0.75,-0.375 -0.75,0.375 -0.375,0.75 0.375,0.75 0.75,0.375 0.75,-0.375 0.375,-0.75
  Mid Layer 2 region: -0.375,-0.75 -0.75,-0.375 -0.75,0.375 -0.375,0.75 0.375,0.75 0.75,0.375 0.75,-0.375 0.375,-0.75
  Bottom Layer region: -0.375,-0.75 -0.75,-0.375 -0.75,0.375 -0.375,0.75 0.375,0.75 0.75,0.375 0.75,-0.375 0.375,-0.75
"TESTPOINT 2MM"#2 [mm]
  oct 2x2 hole 0.3: TP(0,0)
  Top Layer region: -0.5,-1 -1,-0.5 -1,0.5 -0.5,1 0.5,1 1,0.5 1,-0.5 0.5,-1
  Mid Layer 1 region: -0.5,-1 -1,-0.5 -1,0.5 -0.5,1 0.5,1 1,0.5 1,-0.5 0.5,-1
  Mid Layer 2 region: -0.5,-1 -1,-0.5 -1,0.5 -0.5,1 0.5,1 1,0.5 1,-0.5 0.5,-1
  Bottom Layer region: -0.5,-1 -1,-0.5 -1,0.5 -0.5,1 0.5,1 1,0.5 1,-0.5 0.5,-1
"TESTPOINT 2MM"#3 [mm]
  oct 1.5x1.5 hole 0.5: TP(0,2.5)
  Top Layer region: -0.375,1.75 -0.75,2.125 -0.75,2.875 -0.375,3.25 0.375,3.25 0.75,2.875 0.75,2.125 0.375,1.75
  Mid Layer 1 region: -0.375,1.75 -0.75,2.125 -0.75,2.875 -0.375,3.25 0.375,3.25 0.75,2.875 0.75,2.125 0.375,1.75
  Mid Layer 2 region: -0.375,1.75 -0.75,2.125 -0.75,2.875 -0.375,3.25 0.375,3.25 0.75,2.875 0.75,2.125 0.375,1.75
  Bottom Layer region: -0.375,1.75 -0.75,2.125 -0.75,2.875 -0.375,3.25 0.375,3.25 0.75,2.875 0.75,2.125 0.375,1.75
"TESTPOINT 2MM"#4 [mm]
  oct 1.5x1.5 hole 0.5: TP(0,-2.5)
  Top Layer region: -0.375,-3.25 -0.75,-2.875 -0.75,-2.125 -0.375,-1.75 0.375,-1.75 0.75,-2.125 0.75,-2.875 0.375,-3.25
  Mid Layer 1 region: -0.375,-3.25 -0.75,-2.875 -0.75,-2.125 -0.375,-1.75 0.375,-1.75 0.75,-2.125 0.75,-2.875 0.375,-3.25
  Mid Layer 2 region: -0.375,-3.25 -0.75,-2.875 -0.75,-2.125 -0.375,-1.75 0.375,-1.75 0.75,-2.125 0.75,-2.875 0.375,-3.25
  Bottom Layer region: -0.375,-3.25 -0.75,-2.875 -0.75,-2.125 -0.375,-1.75 0.375,-1.75 0.75,-2.125 0.75,-2.875 0.375,-3.25
"TESTPOINT 2MM"#5 [mm]
  oct 1.5x1.5 hole 0.5: TP(2.5,0)
  Top Layer region: 2.125,-0.75 1.75,-0.375 1.75,0.375 2.125,0.75 2.875,0.75 3.25,0.375 3.25,-0.375 2.875,-0.75
  Mid Layer 1 region: 2.125,-0.75 1.75,-0.375 1.75,0.375 2.125,0.75 2.875,0.75 3.25,0.375 3.25,-0.375 2.875,-0.75
  Mid Layer 2 region: 2.125,-0.75 1.75,-0.375 1.75,0.375 2.125,0.75 2.875,0.75 3.25,0.375 3.25,-0.375 2.875,-0.75
  Bottom Layer region: 2.125,-0.75 1.75,-0.375 1.75,0.375 2.125,0.75 2.875,0.75 3.25,0.375 3.25,-0.375 2.875,-0.75
"TESTPOINT 2MM"#6 [mm]
  oct 1x1 hole 0.3: TP(0,0)
  Top Layer region: -0.25,-0.5 -0.5,-0.25 -0.5,0.25 -0.25,0.5 0.25,0.5 0.5,0.25 0.5,-0.25 0.25,-0.5
  Mid Layer 1 region: -0.25,-0.5 -0.5,-0.25 -0.5,0.25 -0.25,0.5 0.25,0.5 0.5,0.25 0.5,-0.25 0.25,-0.5
  Mid Layer 2 region: -0.25,-0.5 -0.5,-0.25 -0.5,0.25 -0.25,0.5 0.25,0.5 0.5,0.25 0.5,-0.25 0.25,-0.5
  Bottom Layer region: -0.25,-0.5 -0.5,-0.25 -0.5,0.25 -0.25,0.5 0.25,0.5 0.5,0.25 0.5,-0.25 0.25,-0.5
TL3305BF100QG [mm]
  rect 1.6x1.4 smd: 1(-3.6,-1.5) 2(3.6,-1.5) 3(-3.6,1.5) 4(3.6,1.5)
  silkscreen extent -5,-2.25 2.25,2.25, body extent -3.75,-2.25 3.75,2.25, height 4.9
TPD1E10B06DPYR [mm]
  rect 0.6x0.5 smd: 1(-0.5,0) 2(0.5,0)
  silkscreen extent -2.2,-0.05 -2.1,0.05, body extent -0.5,-0.3 0.5,0.3, height 0.38
TPS62056DGS [mm]
  rect 1.4x0.3 smd: 1(-2.2,1) 2(-2.2,0.5) 3(-2.2,0) 4(-2.2,-0.5) 5(-2.2,-1) 6(2.2,-1) 7(2.2,-0.5) 8(2.2,0) 9(2.2,0.5) 10(2.2,1)
  silkscreen extent -2.9,-1.5 1.15,1.5, body extent -2.46,-1.5 2.46,1.5, height 1.1
TPS62061DSGR [mm]
  rect 0.7x0.3 smd: 1(-1.05,0.75) 2(-1.05,0.25) 3(-1.05,-0.25) 4(-1.05,-0.75) 5(1.05,-0.75) 6(1.05,-0.25) 7(1.05,0.25) 8(1.05,0.75)
  rect 1x1.7 smd: 9(0,0)
  silkscreen extent -1.52,1.27 -1.28,1.52, body extent -1,-1 1,1, height 0.77
USB4105-GF-A-060 [mm]
  rect 0.6x1.15 smd mask+0.038: A1B12(-3.2,2.378) A4B9(-2.4,2.378) B1A12(3.2,2.378) B4A9(2.4,2.378)
  rect 0.3x1.15 smd mask+0.038: A5(-1.25,2.378) A6(-0.25,2.378) A7(0.25,2.378) A8(1.25,2.378) B5(1.75,2.378) B6(0.75,2.378) B7(-0.75,2.378) B8(-1.75,2.378)
  round 0.65 hole 0.65 unplated paste-2539.97 mask+0.025: MH(-2.89,1.303)
  round 0.65 hole 0.65 unplated mask+0.025: MH(2.89,1.303)
  oval 1x1.8 hole 0.6 slot 1.4 at 90 deg: SH(-4.32,-2.377) SH(4.32,-2.377)
  oval 1x2.1 hole 0.6 slot 1.7 at 90 deg: SH(-4.32,1.803) SH(4.32,1.803)
  silkscreen extent -4.25,-4.5 4.25,0.25, body extent -4.47,-4.97 4.47,2.73, height 3.27

## Part data
C1 C2 C3 C4 C5 C6 C7 C8 C9 C10 C11 C12 C13 C14 C15 C16 C17 C18 C19 C20 C21 C22 C23 C24 C25 C26 C27 C28 C29 C30 C31 C32 C33 C34 C35 C36 C37 C38 C39 C40 C41 C47 C48 C49 C50 C51 C71 C72 C73 C74 C75 C76 C77: library part CMP-112-000001-1, "Capacitor, MLCC, 100nF, 6V3, X5R, 10%, 0603, T=0,8mm", Manufacturer=YAGEO, Manufacturer Part Number=CC0603KRX5R5BB104, Package=C0603, Component Type=Capacitors, ComponentLink1Description=Datasheet, ComponentLink1URL=http://tunmcdsvn.tun.st.com/Component_Datasheet_Library/Trunk/Capacitors/Yageo_Multilayer_capacitor_X5R_series_100pF_to_100uF, Design Item ID=MCD-00237, ECCN_EU=NEC, ECCN_US=EAR99, Internal_Part_Number=MCD-00237, Manufacturer_Part_Number=CC0603KRX5R5BB104, Part_Type=Capacitor, Pin Count=2, Provided_By=SUBCO, Source=MB1364.SCHLIB, Status=Released
C42 C43 C44 C45 C46: "Capacitor Polarised", Arrow Part Number=EDH106M016A9BAA, Manufacturer_Name=KEMET, Mouser Part Number=80-EDH106M016A9BAA, Arrow Price/Stock=https://www.arrow.com/en/products/edh106m016a9baa/kemet-corporation?utm_currency=USD&region=nac, Datasheet Link=https://content.kemet.com/datasheets/KEM_A4049_EDH.pdf, Height=5.65mm, Manufacturer_Part_Number=EDH106M016A9BAA, Mouser Price/Stock=https://www.mouser.co.uk/ProductDetail/KEMET/EDH106M016A9BAA?qs=iR2ablhfrmGRSCLQdrL4eg%3D%3D
C54: library part CMP-2100-03600-2, "CAP CER 10000PF 50V X7R 0603", Capacitance="10 nF", Manufacturer=YAGEO, Package=CC0603-DA, Temperature="-55°C to +125°C", Temperature Characteristic=X7R, Temperature Coefficient=15%, Temperature Range High=+125°C, Temperature Range Low=-55°C, Tolerance=0.1, Voltage="50 V", Automotive=No, Category=Cap, ComponentLink2Description=Datasheet, ComponentLink2URL=http://www.yageo.com/documents/recent/UPY-GPHC_X7R_6.3V-to-50V_18.pdf, Device Class L1="Passive Components", Device Class L2=Capacitors, Device Class L3="Ceramic Capacitors", Digikey Description="CAP CER 10000PF 50V X7R 0603", Footprint Url=http://www.yageo.com/exep/pages/download/literatures/UPY-C_GEN_24.pdf, Height=0.9mm, Lead Free=Yes, Manufacturer Part Number=CC0603KRX7R9BB103, Material=Ceramic, Mouser Description="Multilayer Ceramic Capacitor, CC Series, 0.01 - F, - 10%, X7R, 50 V, 0603 [1608 Metric]", Octopart=https://octopart.com/cc0603krx7r9bb103-yageo-192938, RoHS=TRUE, Voltage Rating="50 V"
C55 C56 C69 C70: library part CMP-004-000035-1, "Capacitor SMD 0603 16V", Design Item ID=CAP_0603_16V, Source=Schematic-Lib-PhilsLab.SchLib
D1 D2 D3 D4 D5 D6 D7 D8 D10 D11: library part CMP-007-000026-1, "LED 0603 RED SMD", Design Item ID=LED_0603_RED, Source=Schematic-Lib-PhilsLab.SchLib
D9: "TVS Diode (Bi-directional)", Manufacturer_Name="Texas Instruments", Mouser Part Number=595-TPD1E10B06DPYR, Arrow Part Number=TPD1E10B06DPYR, Arrow Price/Stock=https://www.arrow.com/en/products/tpd1e10b06dpyr/texas-instruments?region=nac, Datasheet Link=https://www.ti.com/lit/ds/symlink/tpd1e10b06.pdf?HQS=TI-null-null-mousermode-df-pf-null-wwe&ts=1599077798252&ref_url=https%253A%252F%252Fwww.mouser.com%252F, Height=0.45mm, Manufacturer_Part_Number=TPD1E10B06DPYR, Mouser Price/Stock=https://www.mouser.co.uk/ProductDetail/Texas-Instruments/TPD1E10B06DPYR?qs=UFc95S4Z4CaJYpQ4xqTc0g%3D%3D
FB1: library part CMP-010-000008-1, "Ferrite Bead SMD 0603", Design Item ID=FB_0603, Source=Schematic-Lib-PhilsLab.SchLib
FL1 FL2 FL3: "Filter", Manufacturer_Name="Murata Electronics", Mouser Part Number=81-DLM0NSB120HY2D, Datasheet Link=https://www.murata.com/en-us/products/productdetail?partno=DLM0NSB120HY2%23, Height=0.5mm, Manufacturer_Part_Number=DLM0NSB120HY2D, Mouser Price/Stock=https://www.mouser.co.uk/ProductDetail/Murata-Electronics/DLM0NSB120HY2D?qs=d0WKAl%252BL4Kark8uQYdrkog%3D%3D
IC1: "Integrated Circuit", Arrow Part Number=LM3880MF-1AA/NOPB, Manufacturer_Name="Texas Instruments", Mouser Part Number=926-LM3880MF-1AANOPB, Arrow Price/Stock=https://www.arrow.com/en/products/lm3880mf-1aanopb/texas-instruments?region=nac, Datasheet Link=http://www.ti.com/lit/gpn/lm3880, Height=1.45mm, Manufacturer_Part_Number=LM3880MF-1AA/NOPB, Mouser Price/Stock=https://www.mouser.co.uk/ProductDetail/Texas-Instruments/LM3880MF-1AA-NOPB?qs=QbsRYf82W3Fi03r6kJUy6g%3D%3D
IC2: "Integrated Circuit", Manufacturer_Name=STMicroelectronics, Mouser Part Number=511-STM32N657I0H3Q, Arrow Part Number=STM32N657I0H3Q, Arrow Price/Stock=https://www.arrow.com/en/products/stm32n657i0h3q/stmicroelectronics?utm_currency=USD&region=nac, Datasheet Link=https://www.st.com/resource/en/datasheet/stm32n657a0.pdf, Height=1mm, Manufacturer_Part_Number=STM32N657I0H3Q, Mouser Price/Stock=https://www.mouser.co.uk/ProductDetail/STMicroelectronics/STM32N657I0H3Q?qs=a2MtRaTmNOQAexZMsq8u8A%3D%3D
IC4 IC7: "Integrated Circuit", Arrow Part Number=TCR2EF28,LM(CT, Manufacturer_Name=Toshiba, Mouser Part Number=757-TCR2EF28LMCT, Arrow Price/Stock=https://www.arrow.com/en/products/tcr2ef28lm-ct/toshiba?utm_currency=USD&region=nac, Datasheet Link=https://toshiba.semicon-storage.com/info/docget.jsp?did=13794&prodName=TCR2EF28, Height=1.4mm, Manufacturer_Part_Number=TCR2EF28,LM(CT, Mouser Price/Stock=https://www.mouser.co.uk/ProductDetail/Toshiba/TCR2EF28LMCT?qs=cW4DzVrAanOy43sfBSrpyQ%3D%3D
IC5: "Integrated Circuit", Manufacturer_Name="Texas Instruments", Mouser Part Number=595-TPS62056DGS, Arrow Part Number=TPS62056DGS, Arrow Price/Stock=https://www.arrow.com/en/products/tps62056dgs/texas-instruments?region=nac, Datasheet Link=http://componentsearchengine.com/Datasheets/1/TPS62056DGS.pdf, Height=1.1mm, Manufacturer_Part_Number=TPS62056DGS, Mouser Price/Stock=https://www.mouser.co.uk/ProductDetail/Texas-Instruments/TPS62056DGS?qs=Gse6rAGbi7%252BfbVYUmz7rjA%3D%3D
IC6: "Integrated Circuit", Manufacturer_Name="Texas Instruments", Mouser Part Number=595-TPS62061DSGR, Arrow Part Number=TPS62061DSGR, Arrow Price/Stock=https://www.arrow.com/en/products/tps62061dsgr/texas-instruments, Datasheet Link=http://www.ti.com/lit/gpn/TPS62061, Height=0.8mm, Manufacturer_Part_Number=TPS62061DSGR, Mouser Price/Stock=https://www.mouser.com/Search/Refine.aspx?Keyword=595-TPS62061DSGR
J1: "Connector", Manufacturer_Name="Same Sky", Mouser Part Number=179-MSD-4-A, Arrow Part Number=MSD-4-A, Arrow Price/Stock=https://www.arrow.com/en/products/msd-4-a/cui-devices?utm_currency=USD&region=nac, Datasheet Link=https://www.sameskydevices.com/product/resource/msd-4-a.pdf, Height=2mm, Manufacturer_Part_Number=MSD-4-A, Mouser Price/Stock=https://www.mouser.co.uk/ProductDetail/Same-Sky/MSD-4-A?qs=Z%252BL2brAPG1Jll%252BQTi%252Btupg%3D%3D
J2: "Connector", Manufacturer_Name="Tag Connect", Datasheet Link=https://datasheet.datasheetarchive.com/originals/distributors/Datasheets_SAMA/51f607a36a24a0aceedaa5d6ebc30014.pdf, Manufacturer_Part_Number=TC2050-IDC
J3: library part CMP-005-000042-4, "USB Connector Type C SMT 12 Pin", Manufacturer=GCT, Design Item ID=USB4105-GF-A-060, Manufacturer Part Number=USB4105-GF-A-060, Source=Schematic-Lib-PhilsLab.SchLib
J4 J5: "Connector", Manufacturer_Name=Molex, Mouser Part Number=538-505110-2096, Datasheet Link=https://componentsearchengine.com/Datasheets/1/505110-2096.pdf, Height=2.1mm, Manufacturer_Part_Number=505110-2096, Mouser Price/Stock=https://www.mouser.co.uk/ProductDetail/Molex/505110-2096?qs=IvjI65BR3TVK2gHWyfgM0A%3D%3D
L1 L2 L3 L4: library part CMP-2000-05913-1, "Unshielded Wirewound Inductor, 33 nH, 350 mA, -55 to 150 degC, 0603 (1608 Metric), RoHS, Tape and Reel", Current - Saturation=-, Current Rating=350mA, DC Resistance (DCR)=600mOhmMax, Frequency - Self Resonant=3GHz, Frequency - Test=100MHz, Inductance=33nH, Manufacturer=EPCOS-(TDK), Package / Case=0603(1608Metric), Package Description="2-Pin Surface Mount Device, Body 1.6 x 0.8 mm", Package Reference=0603, Q @ Freq=14@100MHz, Ratings=AEC-Q200, Tolerance=±5%, Category=Inductors,Coils,Chokes, Datasheet URL=https://en.tdk.eu/inf/30/db/ind_2008/b82496c.pdf, Datasheet Version=07/2016, Family=FixedInductors, Height - Seated (Max)="0.035\"(0.90mm)", Manufacturer URL=http://www.tdk.com/, Material - Core=Ceramic, Mounting Technology=SurfaceMount, Mounting Type=SurfaceMount, Operating Temperature=-, Packaging=CutTape(CT), Series=SIMID, Shielding=Unshielded, Size / Dimension="0.063\"Lx0.031\"W(1.60mmx0.80mm)", Type=Wirewound
MNT1 MNT2 MNT3 MNT4 MNT5 MNT6 MNT7: library part CMP-002-00124-2, "M3 mounting hole", AUTHOR="Raphael Ho"
NT1: library part CMP-018-000019-1, "Net Tie SMD", Design Item ID=NetTie_SMD, Source=Schematic-Lib-PhilsLab.SchLib
Q1 Q2 Q3 Q4 Q5 Q6 Q10 Q11 Q12: "MOSFET (N-Channel)", Manufacturer_Name="Diodes Incorporated", Mouser Part Number=N/A, Datasheet Link=https://www.diodes.com/datasheet/download/DMG1012T.pdf, Height=0.9mm, Manufacturer_Part_Number=DMG1012T, Mouser Price/Stock=https://www.mouser.co.uk/ProductDetail/Diodes-Incorporated/DMG1012T?qs=Wj%2FVkw3K%252BMD5naxckZUW%2FA%3D%3D
Q7 Q8 Q9: "Transistor", Manufacturer_Name=Infineon, Mouser Part Number=726-BSS214NWH6327XTS, Arrow Part Number=BSS214NWH6327XTSA1, Arrow Price/Stock=https://www.arrow.com/en/products/bss214nwh6327xtsa1/infineon-technologies-ag?utm_currency=USD&region=nac, Datasheet Link=http://www.mouser.com/ds/2/196/BSS214NW_Rev2.2-359325.pdf, Height=1mm, Manufacturer_Part_Number=BSS214NWH6327XTSA1, Mouser Price/Stock=https://www.mouser.co.uk/ProductDetail/Infineon-Technologies/BSS214NWH6327XTSA1?qs=Dj8dEyEphkMe%252Bfnz0ZE2og%3D%3D
R1 R2 R3 R4 R5 R6 R7 R8 R9 R10 R11 R12 R13 R14 R15 R17 R18 R20 R21 R22 R23 R24 R25 R26 R38 R39 R40 R45 R46 R50: library part CMP-009-00181-1, "Chip Resistor, 10k Ohm, 0.1 W, -55 to 155 degC, 0603 (1608 Metric)", Case/Package=0603, Max Operating Temperature=155°C, Min Operating Temperature=-55°C, Power=100mW, Tolerance=1%, Voltage Rating=50V, Created by="Micah Randall", Design Item ID=CMP-009-00006-5, Mounting Technology=SM, Pins=2, RoHS Compliant=Yes, Source="Components - 14.11.22 - 11.28.SchLib"
R37: library part CMP-2100-03667-1, "Chip Resistor, 0 Ohm, +/- 5%, 0.1 W, -55 to 155 degC, 0603 (1608 Metric), RoHS, Tape and Reel", Case Code (Imperial)=0603, Case Code (Metric)=1608, Manufacturer=Yageo, Max Operating Temperature=155degC, Min Operating Temperature=-55degC, Package Description="2-Pin Surface Mount Device, Body 1.6 x 0.8 mm", Package Quantity=5000, Power Rating=100mW, Resistance=0mOhm, Temperature Coefficient=200ppm/degreesC, Tolerance=5%, Voltage Rating=50V, Case/Package=0603, Composition=ThickFilm, Contact Plating=Tin, Datasheet URL=http://www.yageo.com/NewPortal/yageodocoutput?fileName=/pdf/R-Chip/PYu-RC_Group_51_RoHS_L_5.pdf, Datasheet Version="Rev. 5, 10/2016", Depth=0.8mm, Height=0.45mm, Lead Free=LeadFree, Length=1.6mm, Manufacturer URL=http://www.yageo.com/, Military Standard=Not, Number of Pins=2, Package Reference=0603, Packaging=TapeandReel, Radiation Hardening=No, REACH SVHC=NoSVHC, RoHSCompliant=true, Termination=SMD/SMT, Voltage Rating (DC)=50V, Width=0.8mm
RN1 RN2: "Resistor Network", Manufacturer_Name="IRC / TT Electronics", Mouser Part Number=858-BCN164AB103J7, Arrow Part Number=BCN164AB103J7, Arrow Price/Stock=https://www.arrow.com/en/products/bcn164ab103j7/irc, Datasheet Link=https://componentsearchengine.com/Datasheets/1/BCN164AB103J7.pdf, Height=0.6mm, Manufacturer_Part_Number=BCN164AB103J7, Mouser Price/Stock=https://www.mouser.co.uk/ProductDetail/IRC-TT-Electronics/BCN164AB103J7?qs=sKpblPcrDFAYmBHclHBIlw%3D%3D
RN3 RN4: "Resistor Network", Manufacturer_Name="TT Electronics", Mouser Part Number=858-BCN164AB471J7, Datasheet Link=https://www.mouser.com/datasheet/2/414/BCN-1154942.pdf, Height=0.6mm, Manufacturer_Part_Number=BCN164AB471J7
S1: "Switch", Manufacturer_Name="Nidec Copal", Mouser Part Number=229-CJS-1200TA2, Datasheet Link=http://www.nidec-copal-electronics.com/j/catalog/switch/cjs.pdf, Height=2.5mm, Manufacturer_Part_Number=CJS-1200TA2, Mouser Price/Stock=https://www.mouser.co.uk/ProductDetail/Nidec-Components/CJS-1200TA2?qs=XeJtXLiO41Rf26ws0igWdA%3D%3D
S2 S4: "Switch", Manufacturer_Name=E-Switch, Mouser Part Number=612-TL3305BF100QG, Datasheet Link=https://configured-product-images.s3.amazonaws.com/2D/specs/TL3305BF100QG.pdf, Manufacturer_Part_Number=TL3305BF100QG, Mouser Price/Stock=https://www.mouser.co.uk/ProductDetail/E-Switch/TL3305BF100QG?qs=IKkN%2F947nfDIPwqPQja%252BvQ%3D%3D
Y1: "Crystal or Oscillator", Manufacturer_Name=ECS, Mouser Part Number=520-TXO-2016-33-400T, Arrow Part Number=ECS-TXO-2016-33-400-TR, Arrow Price/Stock=https://www.arrow.com/en/products/ecs-txo-2016-33-400-tr/ecs-international?region=nac, Datasheet Link=https://datasheet.datasheetarchive.com/originals/distributors/Datasheets_SAMA/fdc451124f6f80954f29114af1256858.pdf, Height=0.8mm, Manufacturer_Part_Number=ECS-TXO-2016-33-400-TR, Mouser Price/Stock=https://www.mouser.co.uk/ProductDetail/ECS/ECS-TXO-2016-33-400-TR?qs=PzGy0jfpSMtctR53CPxRHg%3D%3D
Y2: "Crystal or Oscillator", Manufacturer_Name=ECS, Datasheet Link=https://ecsxtal.com/store/pdf/ECS-TXO-20CSMV4.pdf, Height=0.8mm, Manufacturer_Part_Number=ECS-TXO-20CSMV4-384-AY-TR
Y3: "Crystal or Oscillator", Manufacturer_Name=ECS, Mouser Part Number=520-TXO-3225MV-240-T, Arrow Part Number=ECS-TXO-3225MV-240-TR, Arrow Price/Stock=https://www.arrow.com/en/products/ecs-txo-3225mv-240-tr/ecs-international?region=nac, Datasheet Link=https://eu.mouser.com/datasheet/2/122/ECS-TXO-3225MV-1634330.pdf, Height=1.2mm, Manufacturer_Part_Number=ECS-TXO-3225MV-240-TR, Mouser Price/Stock=https://www.mouser.co.uk/ProductDetail/ECS/ECS-TXO-3225MV-240-TR?qs=d0WKAl%252BL4KYXn7UuwSFJGQ%3D%3D

## Free pads (board coordinates)
  oct 1.524x1.524 hole 0.762: 2(75,49.5)

## Via types
v1: diameter 0.5, hole 0.3, Top Layer to Bottom Layer, tented both sides, 208 vias
v2: diameter 0.4, hole 0.2, Top Layer to Bottom Layer, tented both sides, 112 vias
v3: diameter 0.6, hole 0.4, Top Layer to Bottom Layer, tented both sides, 47 vias
v4: diameter 0.35, hole 0.2, Top Layer to Bottom Layer, tented both sides, 28 vias
v5: diameter 1, hole 0.5, Top Layer to Bottom Layer, tented both sides, 3 vias
v6: diameter 2.5, hole 2, Top Layer to Bottom Layer, 2 vias
v7: diameter 0.7, hole 0.4, Top Layer to Bottom Layer, tented both sides, 2 vias

## Nets (pads, with @x,y where several pads share a name; then routed paths per layer and width w, separated by ;. In a path a pad name is that pad's centre, name@x,y a point inside that pad or via, vN(x,y) a via of type N, cw(c..) or ccw(c..) an arc to the next point about the centre after c; other vN are vias at no path point)
0V8_DRAIN: D5.A RN3.6 | length 12.4
  Top Layer w0.381: D5.A@54,60.25 54,61.75 56.1,63.85 RN3.6@64,63.85
1V2: 1V2.TP 2V5.TP *1.A5 *1.B1 *1.D3 *1.F9 *1.H9 *1.J2 *1.J4 *1.J7 C43.2 C45.2 C48.2 C50.2 C71.2 IC4.5 J4.19 J5.2 Q12.1 RN1.3 | length 150.1
  Top Layer w0.11: *1.A5@92.8,36 v2(93.2,36.4) ; *1.B1@93.6,32.8 v2(94,33.2) ; v2(94.8,34.8) *1.D3@95.2,34.4 ; v2(96.402,38.798) 96.402,38.8 96.8,39.198 *1.F9@96.8,39.2 *1.F9@96.8,39.209 ; v2(98,38.8) *1.H9@98.4,39.2 ; v2(98.8,34) *1.J2@99.2,33.6 ; v2(98.8,37.2) *1.J7@99.2,37.6 ; *1.J4@99.2,35.2 v2(99.6,35.6)
  Top Layer w0.2: 1V2.TP@87,24 91.25,24 v3(91.75,23.5)
  Top Layer w0.3: Q12.1@56,55.5 56,54.25 57.35,52.9 RN1.3@63.75,52.9 ; J5.2@91.75,21.5 v3(91.75,23.5)
  Top Layer w0.381: IC4.5@36.45,20.275 36.488,20.237 38.5,20.237 ; v5(38,17.75) 38,19.737 38.5,20.237 ; C71.2@39.5,20.2 39.463,20.237 38.5,20.237 ; v1(57.7,40.3) 58.65,39.35 J4.19@60.9,39.35
  Mid Layer 2 w0.2: v2(93.2,36.4) 94,35.6 v2(94.8,34.8) ; v3(94.25,30.25) 94.25,32.896 94,33.146 v2(94,33.2) 94.8,34 v2(94.8,34.8) ; v2(96.402,38.798) 97.2,38 ; v2(98,38.8) 97.4,38.2 97.2,38 ; v2(98.8,34) 98.8,34.802 ; v2(98.8,37.2) 97.2,37.2 ; v2(99.6,35.6) 98.802,34.802 98.8,34.802 ; v2(94.8,34.8) 96.303,34.8 97.203,35.7 ; 97.2,37.2 97.203,37.197 97.203,35.7 ; 97.2,37.2 97.2,38 ; 97.203,35.7 97.902,35.7 98.8,34.802
  Mid Layer 2 w0.381: 2V5.TP@6.75,24.5 8.45,26.2 17.6,26.2 24,19.8 24,17.5 24.8,16.7 36.95,16.7 v5(38,17.75) ; v1(57.4,52.9) v1@57.423,52.877 ; v1(57.7,40.3) v1@57.723,40.323
  Bottom Layer w0.3: v1(57.4,52.9) 57.7,52.6 v1(57.7,40.3)
  Bottom Layer w0.381: v5(38,17.75) 44.75,17.75 57.7,30.7 v1(57.7,40.3)
  Bottom Layer w0.5: C48.2@86.95,30 90,30 ; C43.2@90,32.2 90,32 90,30 ; v3(91.5,30) 90,30 ; C50.2@94.2,31.305 94.25,31.305 v3(94.25,30.25) ; v2(98,38.8) 98,40.5 100.154,42.654 101.854,42.654 C45.2@102,42.8
1V8: 1V8.TP *1.A6 *1.B2 *1.E9 *1.G9 *1.H1 *1.J3 *1.J6 *1.J8 C18.2 C35.2 C36.2 C42.2 C47.2 C73.1 C74.1 IC2.M1 IC2.P5 J4.18 J5.3 L4.2 Q7.3 Q9.3 Q10.1 R10.1 R13.1 R39.1 RN1.1 | length 263.6
  Top Layer w0.11: *1.A6@92.8,36.8 v2(93.2,37.2) ; *1.B2@93.6,33.6 v2(94,34) ; v2(95.6,38.8) *1.E9@96,39.2 ; v2(97.2,38.8) *1.G9@97.6,39.2 ; v2(98.4,32) *1.H1@98.4,32.8 ; v2(98.8,38.8) *1.J8@99.2,38.4 ; v2(98.81,36.402) 98.81,36.405 99.2,36.795 *1.J6@99.2,36.8 ; *1.J3@99.2,34.4 99.25,34.4 99.65,34 v2(99.7,34)
  Top Layer w0.2: v4(38.26,30.14) IC2.M1@38.6,29.8 ; v2(39.8,33.4) IC2.P5@40.2,33
  Top Layer w0.3: J5.3@92.25,21.5 92.25,20.85 92,20.6 92,19.75 93,18.75 v3(95.5,18.75)
  Top Layer w0.381: L4.2@29.25,2.84 29.35,2.84 29.48,2.71 29.48,2.395 29.703,2.172 30.672,2.172 v5(30.75,2.25) ; C73.1@36.2,4 36.2,2.832 36.25,2.782 v1(36.25,2.75) ; C74.1@36.2,6.25 36.2,7.418 36.25,7.468 v1(36.25,7.5) ; R39.1@39.75,6.25 v1(39.75,7.5) 41,8.75 41,26.3 v1(40.4,26.9) ; Q10.1@58.5,55.5 58.5,54.25 59,53.75 59.782,53.75 59.832,53.7 RN1.1@63.75,53.7 ; J4.18@60.9,38.85 62.15,38.85 v1(63,38)
  Mid Layer 2 w0.2: v4(38.26,30.14) 38.265,30.14 38.705,29.699 40.799,29.699 ; v2(39.8,33.4) 41.75,31.45 v2@41.75,29.75 ; v1(40.4,26.9) 40.4,29.3 40.799,29.699 ; v2(41.75,29.699) 40.799,29.699
  Mid Layer 2 w0.381: 19.34,42 13.6,42 12.899,42.701 12.899,43.777 13.122,44 24.2,44 26.2,42 30.4,42 v2(32.6,39.8)
  Mid Layer 2 w1: 1V8.TP@11,24.5 12.3,24.5 13.02,23.78 13.02,20.486 13.606,19.9 18.1,19.9 20,18 20,4 21.75,2.25 v5(30.75,2.25)
  Bottom Layer w0.2: C18.2@41.05,30.5 41.05,30.375 41.726,29.699 v2(41.75,29.699)
  Bottom Layer w0.381: 7.25,28.25 28.425,28.25 29.075,28.9 C35.2@29.2,28.9 ; v5(30.75,2.25) 34.5,2.25 35,2.75 ; v2(32.6,39.8) 32.6,40.62 32.73,40.75 C36.2@32.75,40.75 ; v1(36.25,2.75) 35,2.75 ; v1(36.25,7.5) v1(39.75,7.5) 35,2.75 ; v1@39.773,7.523 60.25,28 60.25,36 ; v1(59.75,53.75) 60.25,53.25 60.25,36 ; v1(63,38) 63,37.5 62.75,37.25 61.5,37.25 60.25,36
  Bottom Layer w0.5: R13.1@94,18 v3(95,18) ; v3(96,18) R10.1@97,18 ; C42.2@103.25,32.2 v3(103.25,34.25) ; v3(103.25,35.25) C47.2@103.25,36.3
  Bottom Layer w1: 1V8.TP@11,24.5 11,27.514 10.414,28.1 7.4,28.1 7.25,28.25 5.925,29.575 5.925,39.525 8.4,42 19.1,42
  other v1: 19.75,41.5 20.5,41.5 19.75,42.5 20.5,42.5
1V8_DRAIN: D4.A RN3.8 | length 6.4
  Top Layer w0.381: D4.A@59,60.25 59,61.25 60,62.25 RN3.8@64,62.25
1V35_DRAIN: D11.A RN3.7 | length 9.2
  Top Layer w0.381: D11.A@56.5,60.25 56.5,61.25 58.3,63.05 RN3.7@64,63.05
2V8: 1V35.TP 2V8.TP *1.A2 *1.A8 *1.B9 *1.C9 C39.2 C44.2 C46.2 C49.2 C51.2 C76.2 D10.A IC7.5 J4.17 J5.4 R14.1 Y3.4 | length 164
  Top Layer w0.11: *1.A2@92.8,33.6 v2(93.2,33.2) ; *1.A8@92.8,38.4 v2(93.2,38.8) ; *1.B9@93.6,39.199 v2@94,38.799 ; *1.C9@94.4,39.199 v2@94.8,38.799
  Top Layer w0.3: v3(92.75,20.411) J5.4@92.75,21.5
  Top Layer w0.381: IC7.5@36.45,13.45 36.475,13.475 37.975,13.475 v5(38,13.5) 38.025,13.475 39.475,13.475 C76.2@39.5,13.45 ; v1(59,38) 59.032,38 59.382,38.35 J4.17@60.9,38.35
  Top Layer w0.5: D10.A@61.5,60.25 v1(62.75,60.25)